# Altium PCB MCH_CLKB_PCB.PcbDoc (part 1 of 5)
Units mil, origin at the board's own origin, x right, y up, seen from the top; angles counter-clockwise.
Board outline 7110.67 x 2894.12 mil, 6 copper layers (Top Layer, GND, MidLayer1, MidLayer2, InternalPlane1, Bottom Layer), stack 61.549 mil thick; 421 components, 433 nets, 2112 pads, 1311 vias.
Unrouted connection lines stored in the file: 39.
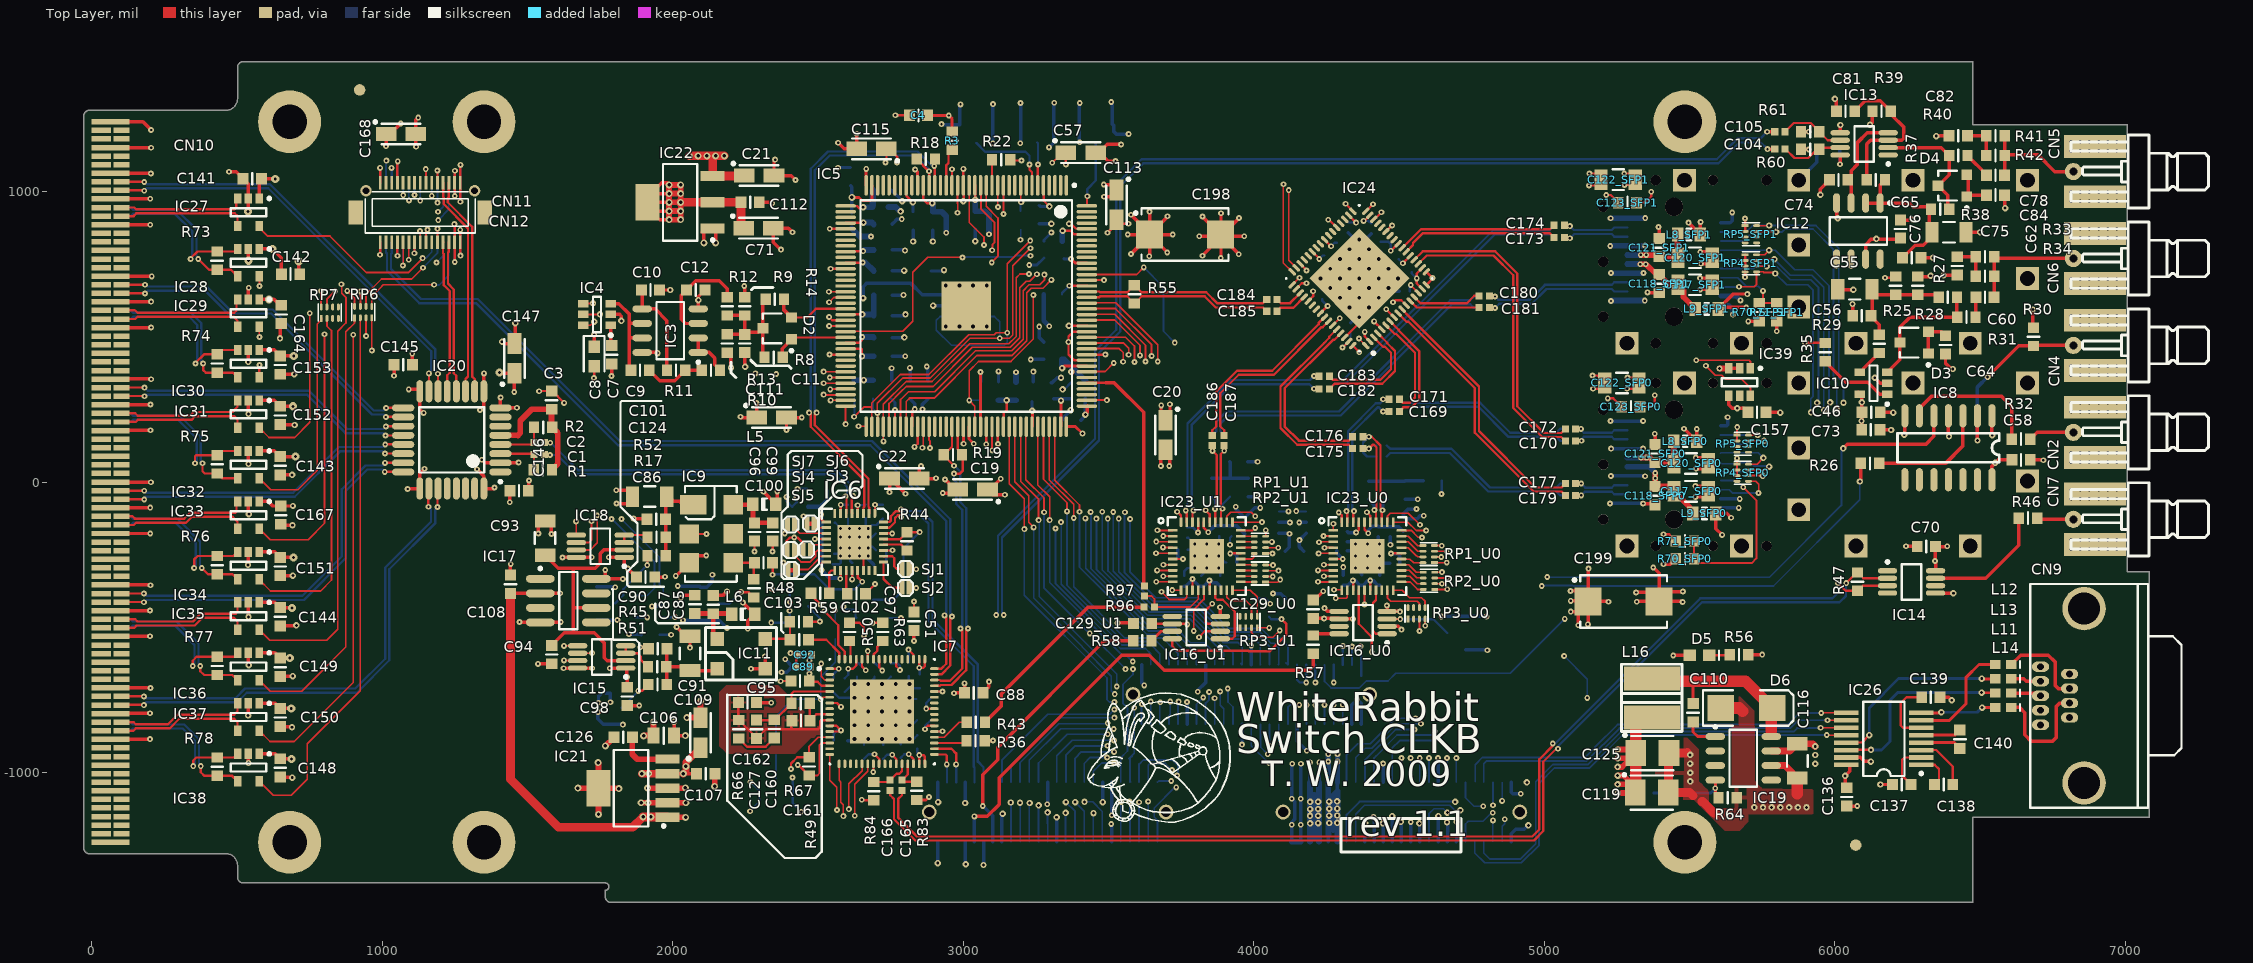
[diagram p0: Top Layer view]
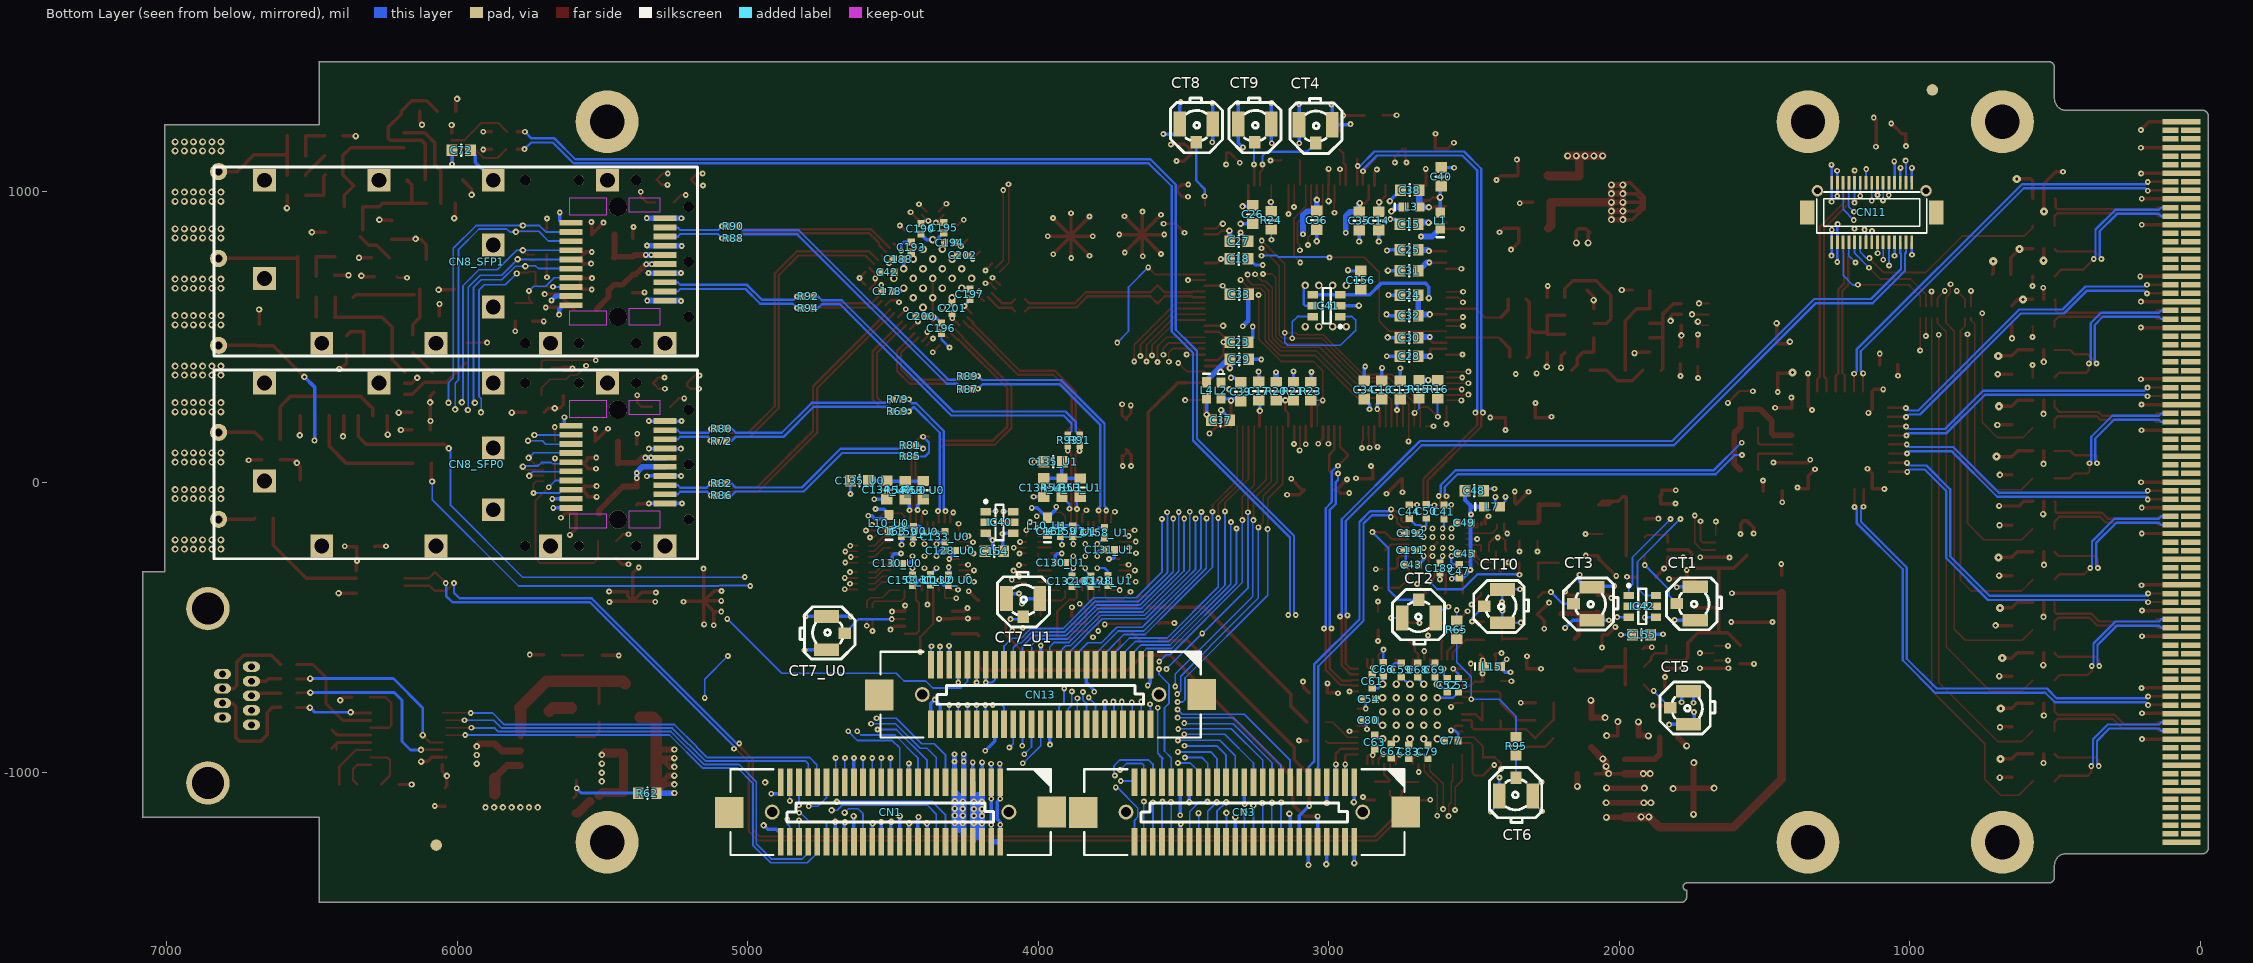
[diagram p1: Bottom Layer view, seen from below]
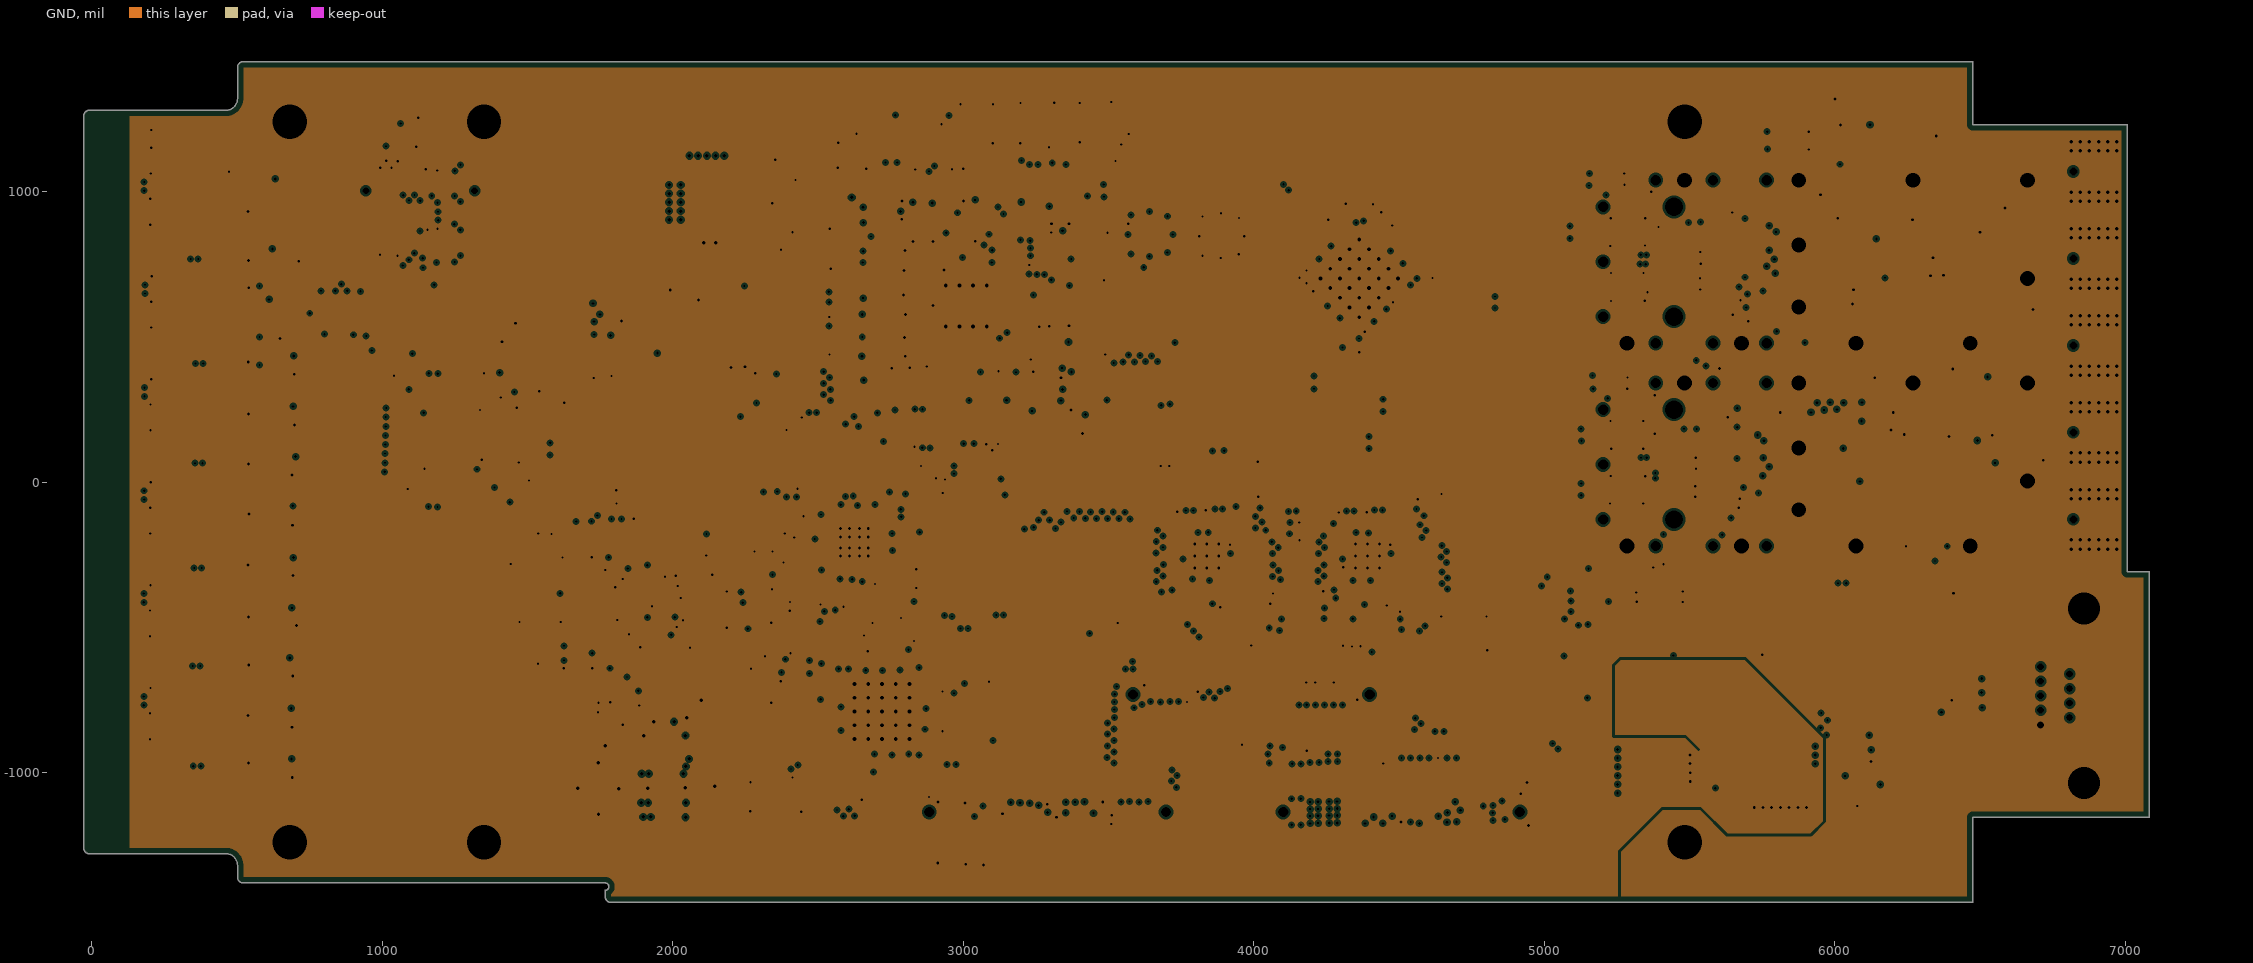
[diagram p2: GND, clearances drawn from the general rule]
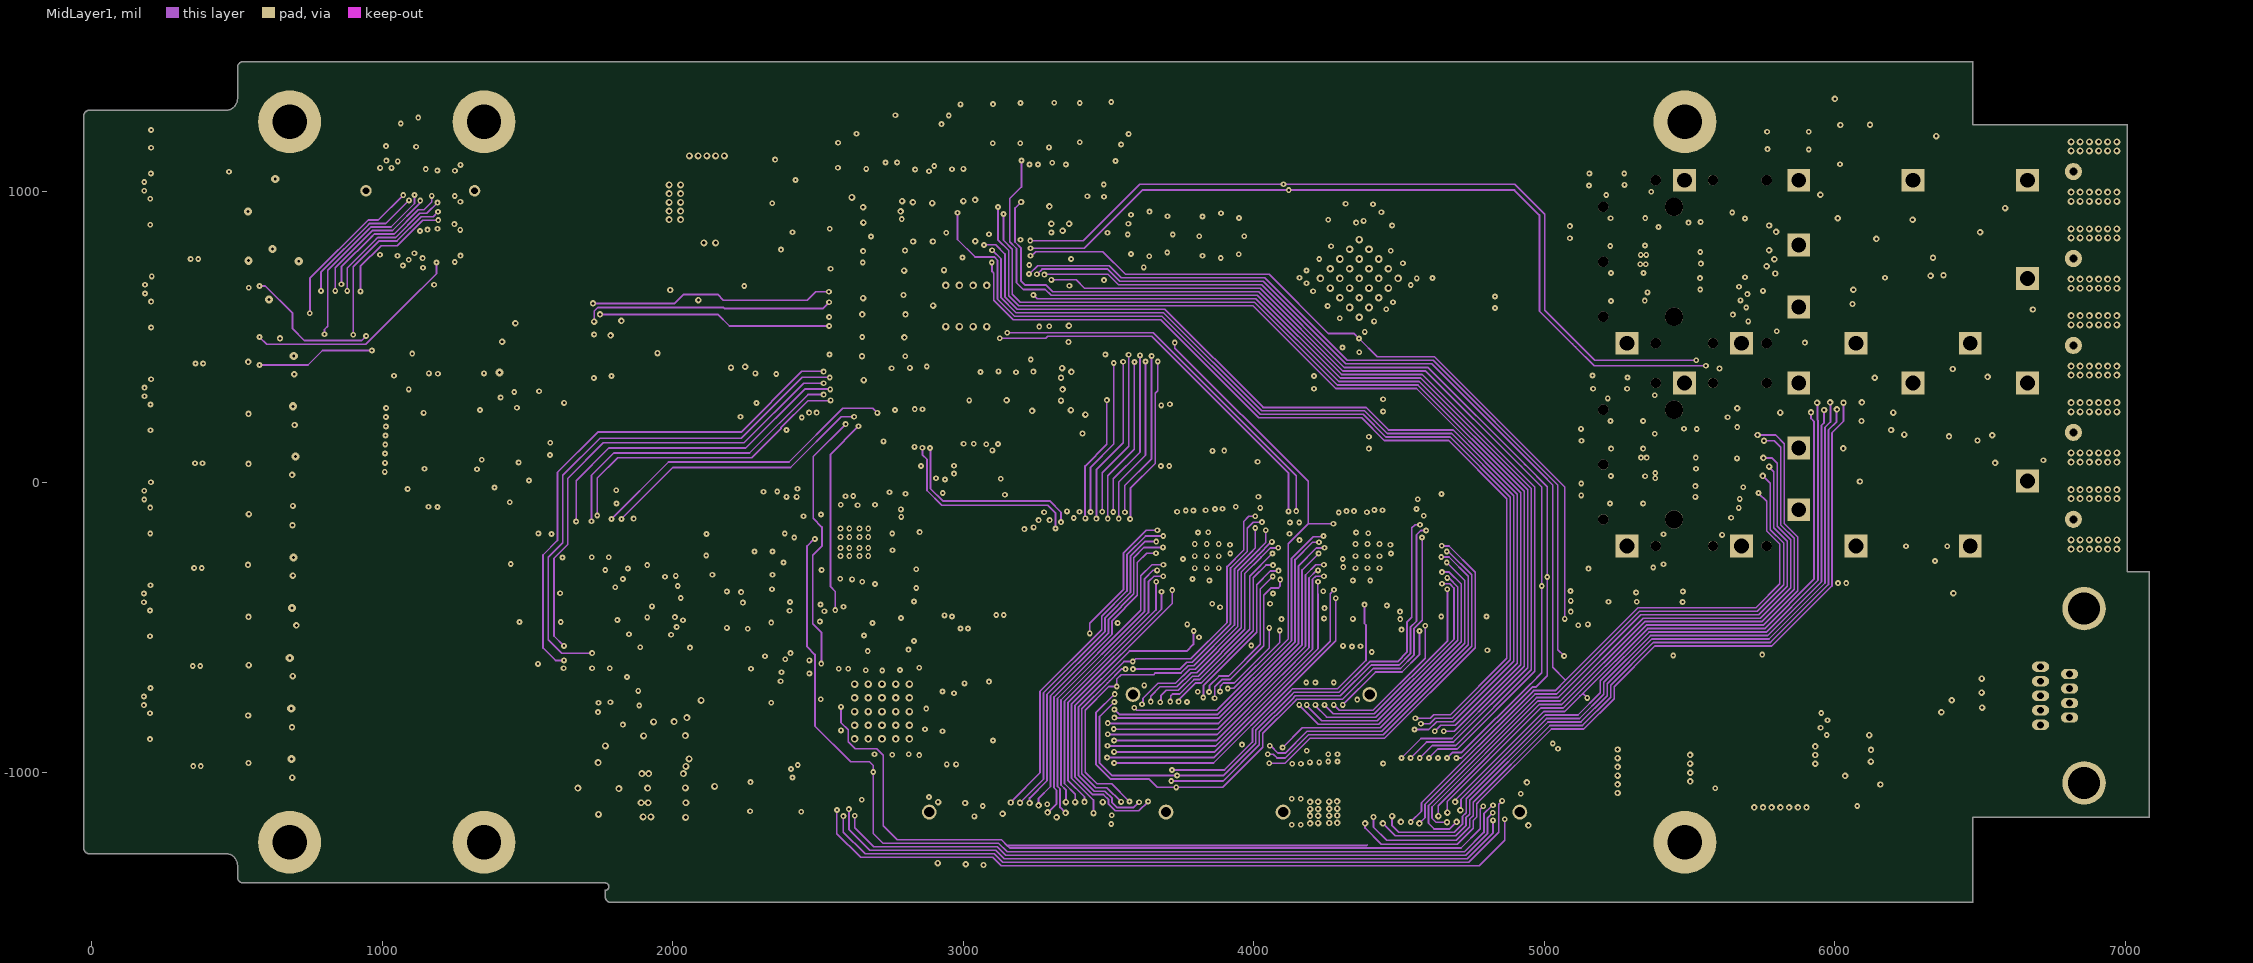
[diagram p3: MidLayer1]
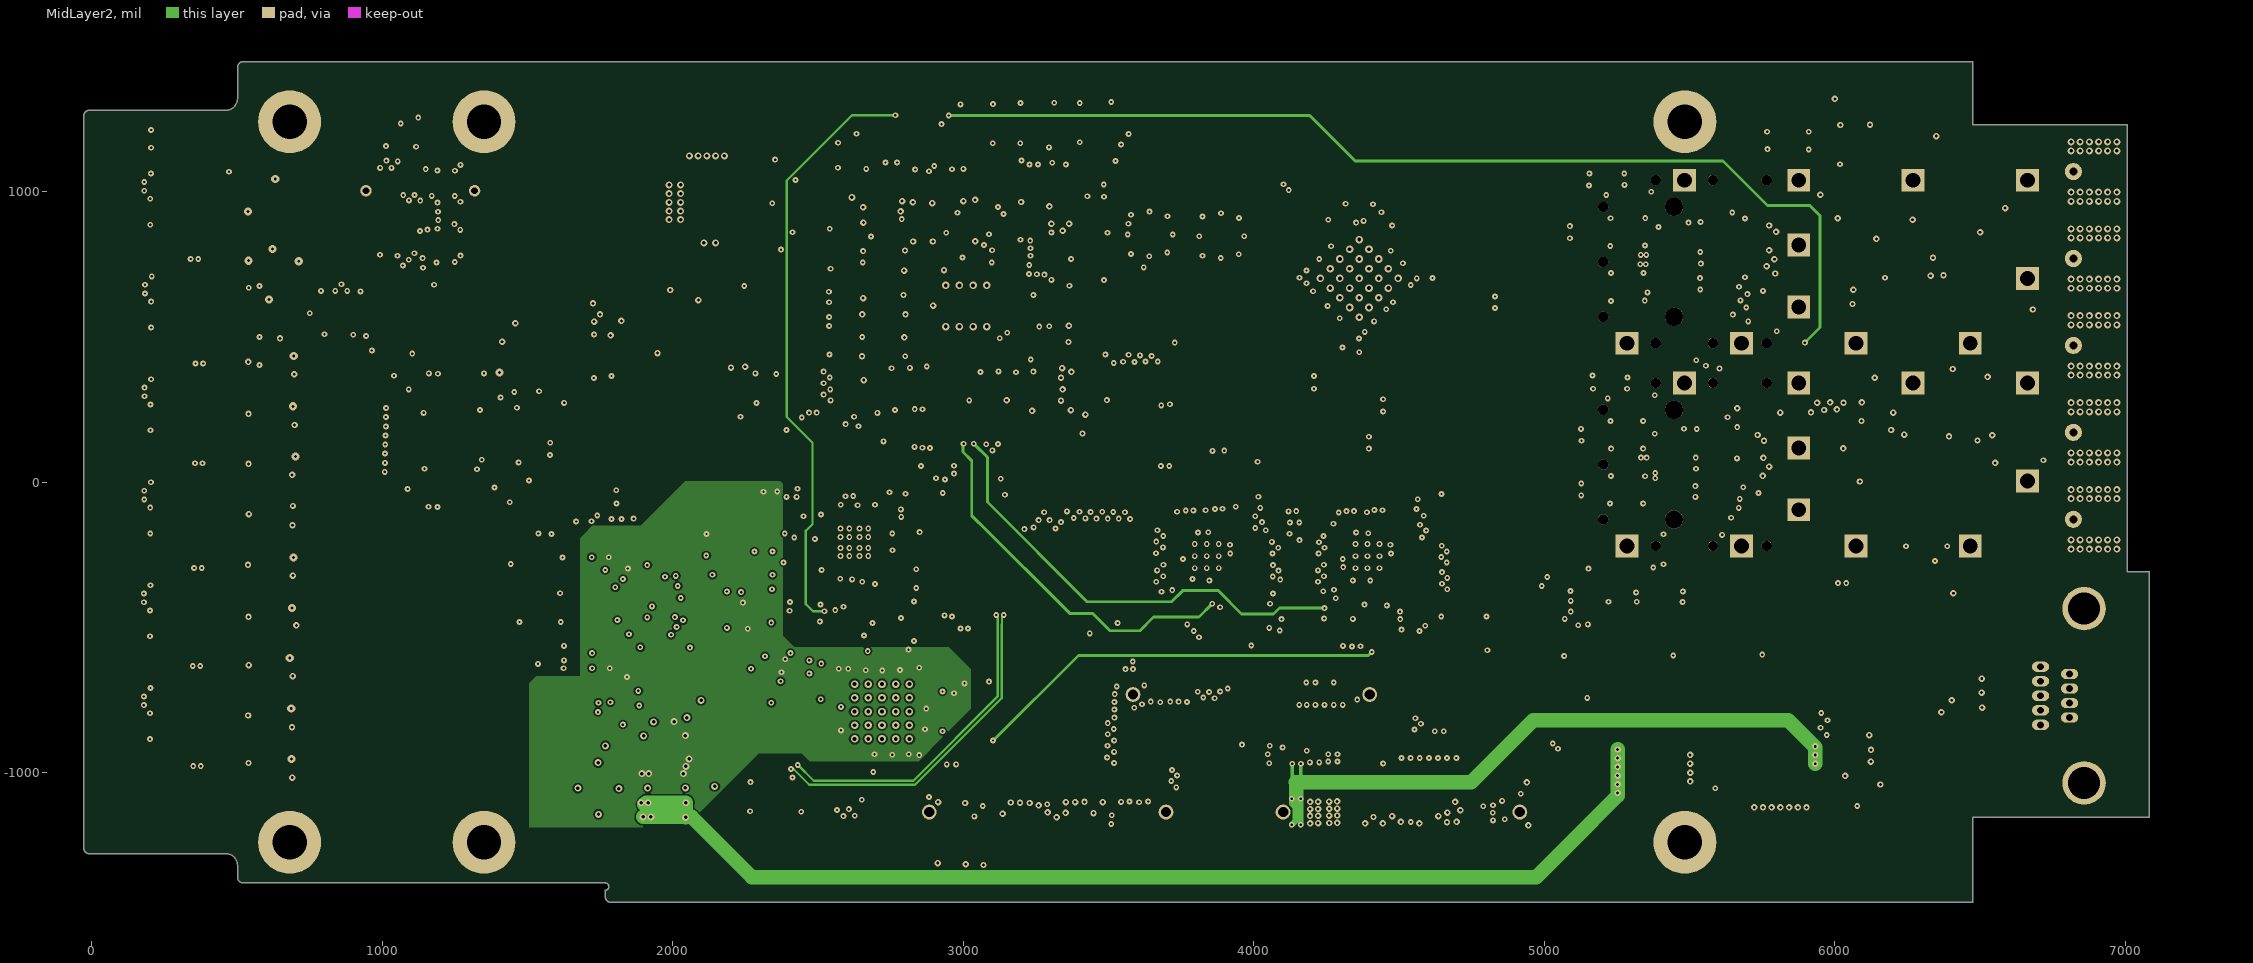
[diagram p4: MidLayer2]
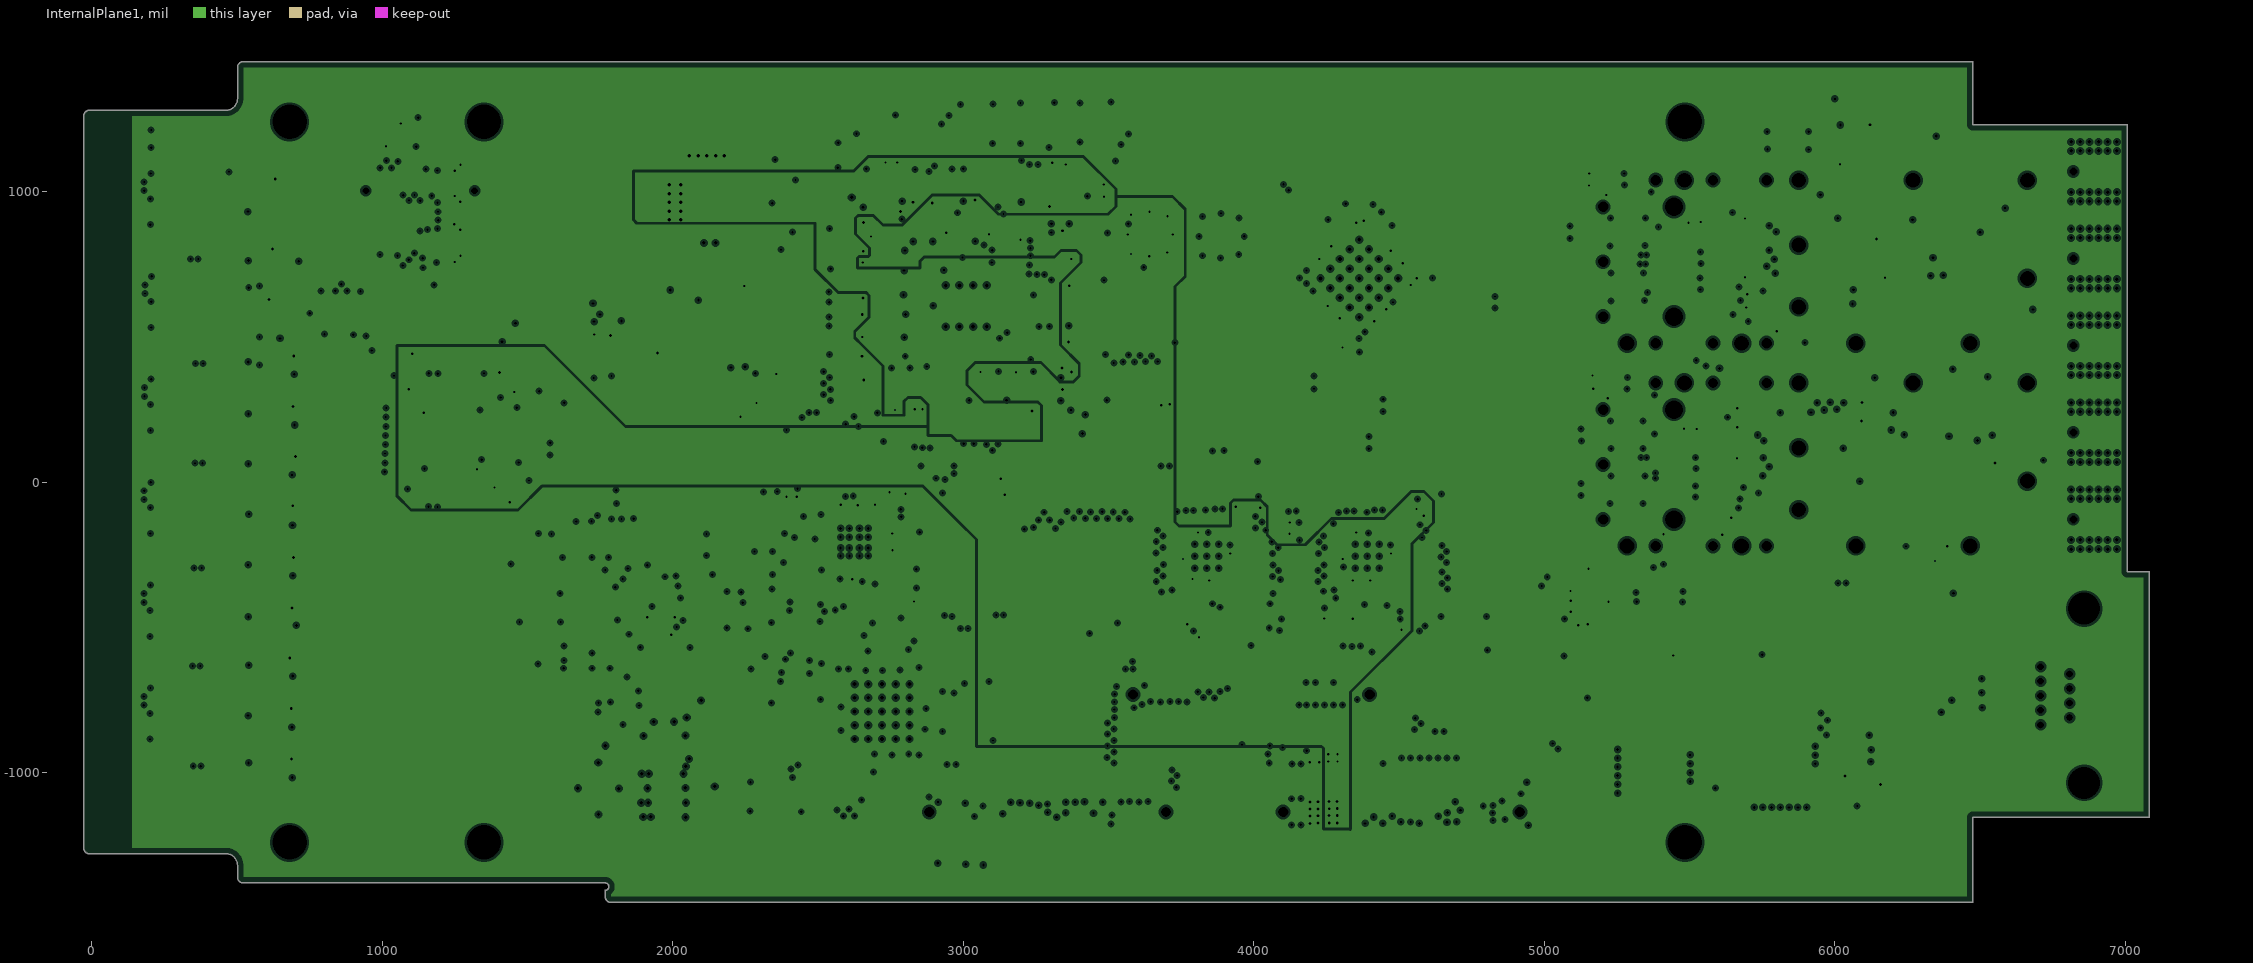
[diagram p5: InternalPlane1, clearances drawn from the general rule]

## Layer stack, top to bottom
Top Layer: signal copper 1.4
Dielectric: core 10.6299, FR-4, Dk 4.8
GND: plane copper 1.4, net GND
Dielectric: prepreg 10.6299, FR-4, Dk 4.8
MidLayer1: signal copper 1.4
Dielectric: core 10.6299, FR-4, Dk 4.8
MidLayer2: signal copper 1.4
Dielectric: prepreg 10.6299, FR-4, Dk 4.8
InternalPlane1: plane copper 1.4, net (Multiple Nets)
Dielectric: core 10.6299, FR-4, Dk 4.8
Bottom Layer: signal copper 1.4

## Board outline
-8.43,-1279.74 ccw(c-8.41,-1279.53) -8.41,-1279.74 -8.39,-1279.74 ccw(c-7.73,-1259.78) -7.76,-1279.75 ccw(c-7.76,-1279.54) -7.69,-1279.74 462.66,-1279.74 cw(c462.66,-1318.9) 501.82,-1318.9 501.82,-1360.24 ccw(c521.71,-1360.24) 521.71,-1380.13 1767.78,-1380.13 cw(c1767.78,-1392.72) 1780.36,-1392.72 cw(c1767.78,-1392.72) 1767.78,-1405.3 ccw(c1767.78,-1405.51) 1767.56,-1405.51 1767.56,-1427.17 ccw(c1787.46,-1427.17) 1787.46,-1447.06 6474.47,-1447.06 ccw(c6474.47,-1446.85) 6474.68,-1446.85 6474.68,-1153.76 7082.74,-1153.76 ccw(c7082.74,-1153.54) 7082.95,-1153.54 7082.95,-309.51 ccw(c7082.74,-309.51) 7082.63,-309.33 ccw(c7082.54,-309.52) 7082.54,-309.31 7007.57,-309.31 7007.57,1230.2 ccw(c7007.36,1230.2) 7007.56,1230.28 ccw(c7007.35,1230.31) 7007.56,1230.31 ccw(c7007.35,1230.31) 7007.35,1230.53 6474.68,1230.53 6474.68,1446.85 ccw(c6474.47,1446.85) 6474.47,1447.06 521.71,1447.06 ccw(c521.71,1427.17) 501.82,1427.17 501.82,1318.9 cw(c461.67,1319.88) 462.09,1279.73 ccw(c462.03,1279.53) 462.03,1279.74 -7.8,1279.74 ccw(c-7.8,1279.53) -7.86,1279.73 ccw(c-7.74,1259.76) -27.72,1259.79 ccw(c-27.51,1259.79) -27.71,1259.73 -27.71,-1259.92 ccw(c-27.5,-1259.92) -27.7,-1259.99 ccw(c-7.73,-1259.78)

## Design rules (kind name [scope] priority, off if disabled: settings)
Clearance Clearance_ext_gnd [inpolygon and onlayer('top layer') and innet('gnd') vs not innet('gnd')] p1: gap=16
Clearance Clearance_poly [InPolygon and (InNet('+2v5') or innet('+3v3') or innet('+1v2'))] p2: gap=8
Clearance [All] p3: gap=6
DiffPairsRouting [All] p1: maxlimit=10 minlimit=6 mostfreqgap=10 toplayer_prefgap=6 midlayer1_prefgap=6 midlayer2_prefgap=6 bottomlayer_prefgap=6 maxuncoupledlength=500
HoleSize [All] p1: absolutevalues=TRUE maxlimit=118.11 minlimit=1 maxpercent=80.000 minpercent=20.000
PlaneClearance [All] p1: clearance=8
PlaneConnect [All] p1: planeconnectstyle=Direct reliefexpansion=20 reliefentries=4 reliefconductorwidth=10 reliefairgap=10
PolygonConnect PolygonConnect_ext_vias [name='poly_external' vs isvia] p1: connectstyle=Direct reliefconductorwidth=10 reliefentries=4 polygonreliefangle="90 Angle"
PolygonConnect PolygonConnect_external [name='poly_external' vs not isvia] p2: connectstyle=Relief reliefconductorwidth=15 reliefentries=4 polygonreliefangle="90 Angle"
PolygonConnect PolygonConnect_internal [name='poly_internal'] p3: connectstyle=Direct reliefconductorwidth=10 reliefentries=4 polygonreliefangle="90 Angle"
PolygonConnect [name='poly_ext_gnd'] p4: connectstyle=Direct reliefconductorwidth=10 reliefentries=4 polygonreliefangle="90 Angle"
RoomDefinition U_CLKB_uplinks [InComponentClass('U_CLKB_uplinks')] p1: confinementstyle=ConfineIn formatcopy=TRUE lockcomponents=FALSE outline 3601.5,1002 5150.5,1002 5150.5,-642 3601.5,-642
RoomDefinition U1 [InComponentClass('U1')] p2: confinementstyle=ConfineIn formatcopy=TRUE lockcomponents=FALSE outline -1527.5,-3020 472.5,-3020 472.5,-2020 -1527.5,-2020
RoomDefinition U0 [InComponentClass('U0')] p3: confinementstyle=ConfineIn formatcopy=TRUE lockcomponents=FALSE outline -1527.5,-3020 472.5,-3020 472.5,-2020 -1527.5,-2020
RoomDefinition SMI [InComponentClass('SMI')] p4: confinementstyle=ConfineIn formatcopy=TRUE lockcomponents=FALSE outline -1527.5,-3020 472.5,-3020 472.5,-2020 -1527.5,-2020
RoomDefinition SFP1 [InComponentClass('SFP1')] p5: confinementstyle=ConfineIn formatcopy=TRUE lockcomponents=FALSE outline -1527.5,-3020 472.5,-3020 472.5,-2020 -1527.5,-2020
RoomDefinition SFP0 [InComponentClass('SFP0')] p6: confinementstyle=ConfineIn formatcopy=TRUE lockcomponents=FALSE outline -1527.5,-3020 472.5,-3020 472.5,-2020 -1527.5,-2020
RoutingVias [All] p1: holewidth=8 width=20 viastyle="Through Hole" minholewidth=8 minwidth=20 maxholewidth=50 maxwidth=100
SilkscreenOverComponentPads [All] p1: minsilkscreentomaskgap=10
SolderMaskExpansion [All] p1: expansion=4
TestPointUsage [All] p1: valid=0 allowmultiple=FALSE
Testpoint [All] p1: side=15 testpointundercomponent=TRUE minsize=40 maxsize=100 preferedsize=60 minholesize=0 maxholesize=40 preferedholesize=32 testpointgrid=1 style=1023 order=0-112345678
Width [All] p1: maxlimit=200 minlimit=5 preferedwidth=5
19 further rules are at their usual default settings.

## Classes and differential pairs
channel class CLKB_uplink_phy: U0 U1
component class U1: C128_U1 C129_U1 C130_U1 C131_U1 C132_U1 C133_U1 C134_U1 C135_U1 C158_U1 C159_U1 C163_U1 CT7_U1 IC16_U1 IC23_U1 L10_U1 R53_U1 R54_U1 RP1_U1 RP2_U1 RP3_U1
component class U0: C128_U0 C129_U0 C130_U0 C131_U0 C132_U0 C133_U0 C134_U0 C135_U0 C158_U0 C159_U0 C163_U0 CT7_U0 IC16_U0 IC23_U0 L10_U0 R53_U0 R54_U0 RP1_U0 RP2_U0 RP3_U0
channel class CLKB_SFP_wrapper: SFP0 SFP1
component class U_CLKB_uplinks: C169 C170 C171 C172 C173 C174 C175 C176 C177 C178 C179 C180 C181 C182 C183 C184 C185 C186 C187 C188 C189 C190 C191 C192 C193 C194 C195 C196 C197 C200 C201 C202 IC24 IC? R69 R72 R79 R80 R81 R82 R85 R86 R87 R88 R89 R90 R91 R92 R93 R94
component class SFP1: C117_SFP1 C118_SFP1 C120_SFP1 C121_SFP1 C122_SFP1 C123_SFP1 CN8_SFP1 L8_SFP1 L9_SFP1 R70_SFP1 R71_SFP1 RP4_SFP1 RP5_SFP1
component class SFP0: C117_SFP0 C118_SFP0 C120_SFP0 C121_SFP0 C122_SFP0 C123_SFP0 CN8_SFP0 L8_SFP0 L9_SFP0 R70_SFP0 R71_SFP0 RP4_SFP0 RP5_SFP0
component class APD: C7 C8 C9 C10 C11 C12 D2 IC3 IC4 R8 R9 R10 R11 R12 R13 R14
component class CLKB_main: CN1 CN2 CN3 CN4 CN5 CN6 CN7 CN13 R57 R58 R96 R97
component class CLK: C4 C41 C42 C43 C44 C45 C46 C47 C48 C49 C50 C51 C52 C53 C54 C55 C56 C58 C59 C60 C61 C62 C63 C64 C65 C66 C67 C68 C69 C70 C72 C73 C74 C75 C76 C77 C78 C79 C80 C81 C82 C83 C84 C85 C86 C87 C88 C89 C90 C91 C92 C93 C94 C95 C96 C97 C98 C99 C100 C101 C102 C103 C104 C105 C124 C127 C160 C161 C162 C165 C166 CT1 CT2 CT3 CT5 CT6 CT10 D3 D4 IC6 IC7 IC8 IC9 IC10 IC11 IC12 IC13 IC14 IC15 IC17 IC18 L5 L6 L7 L15 R17 R25 R26 R27 R28 R29 R30 R31 R32 R33 R34 R35 R36 R37 R38 R39 R40 R41 R42 R43 R44 R45 R46 R47 R48 R49 R50 R51 R52 R59 R60 R61 R63 R65 R66 R67 R83 R84 R95 SJ1 SJ2 SJ3 SJ4 SJ5 SJ6 SJ7
component class FPGA: C13 C14 C15 C16 C17 C18 C19 C20 C21 C22 C23 C24 C25 C26 C27 C28 C29 C30 C31 C32 C33 C34 C35 C36 C37 C38 C39 C40 C57 C71 CT4 CT8 CT9 IC5 L1 L2 L3 L4 R3 R15 R16 R18 R19 R20 R21 R22 R23 R24 R55
component class PWR: C106 C107 C108 C109 C110 C111 C112 C113 C115 C116 C119 C125 C126 C198 C199 D5 D6 IC19 IC21 IC22 L16 R56 R62 R64
component class RS232: C136 C137 C138 C139 C140 CN9 IC26 L11 L12 L13 L14
component class SENS: C154 C155 C156 C157 IC39 IC40 IC41 IC42
component class SMI: C1 C2 C3 C141 C142 C143 C144 C145 C146 C147 C148 C149 C150 C151 C152 C153 C164 C167 C168 CN10 CN11 CN12 IC20 IC27 IC28 IC29 IC30 IC31 IC32 IC33 IC34 IC35 IC36 IC37 IC38 R1 R2 R73 R74 R75 R76 R77 R78 RP6 RP7
net class CMI_PIO[0..3]: CMI_PIO0 CMI_PIO1 CMI_PIO2 CMI_PIO3
net class UP0_RD[0..9]: UP0_RD0 UP0_RD1 UP0_RD2 UP0_RD3 UP0_RD4 UP0_RD5 UP0_RD6 UP0_RD7 UP0_RD8 UP0_RD9
net class UP0_TD[0..9]: UP0_TD0 UP0_TD1 UP0_TD2 UP0_TD3 UP0_TD4 UP0_TD5 UP0_TD6 UP0_TD7 UP0_TD8 UP0_TD9
net class UP1_RD[0..9]: UP1_RD0 UP1_RD1 UP1_RD2 UP1_RD3 UP1_RD4 UP1_RD5 UP1_RD6 UP1_RD7 UP1_RD8 UP1_RD9
net class UP1_TD[0..9]: UP1_TD0 UP1_TD1 UP1_TD2 UP1_TD3 UP1_TD4 UP1_TD5 UP1_TD6 UP1_TD7 UP1_TD8 UP1_TD9
differential pair EXTREF: +EXTREF_P -EXTREF_N
differential pair REFCLK_MAIN: +REFCLK_MAIN_P -REFCLK_MAIN_N
differential pair REFCLK_FB: +REFCLK_FB_P -REFCLK_FB_N
differential pair REFCLK_FAN: +REFCLK_FAN_P -REFCLK_FAN_N
differential pair UP1_TX: +UP1_TX_P -UP1_TX_N
differential pair UP1_RX: +UP1_RX_P -UP1_RX_N
differential pair UP0_TX: +UP0_TX_P -UP0_TX_N
differential pair UP0_RX: +UP0_RX_P -UP0_RX_N
differential pair SMI_RX0: +SMI_RX0_P -SMI_RX0_N
differential pair SMI_RX1: +SMI_RX1_P -SMI_RX1_N
differential pair SMI_RX2: +SMI_RX2_P -SMI_RX2_N
differential pair SMI_RX3: +SMI_RX3_P -SMI_RX3_N
differential pair SMI_RX4: +SMI_RX4_P -SMI_RX4_N
differential pair SMI_RX5: +SMI_RX5_P -SMI_RX5_N
differential pair SMI_TX0: +SMI_TX0_P -SMI_TX0_N
differential pair SMI_TX1: +SMI_TX1_P -SMI_TX1_N
differential pair SMI_TX2: +SMI_TX2_P -SMI_TX2_N
differential pair SMI_TX3: +SMI_TX3_P -SMI_TX3_N
differential pair SMI_TX4: +SMI_TX4_P -SMI_TX4_N
differential pair SMI_TX5: +SMI_TX5_P -SMI_TX5_N
differential pair SFP0_RX: +SFP0_RX_P -SFP0_RX_N
differential pair SFP0_TX: +SFP0_TX_P -SFP0_TX_N
differential pair SFP1_RX: +SFP1_RX_P -SFP1_RX_N
differential pair SFP1_TX: +SFP1_TX_P -SFP1_TX_N
differential pair XIN0: +XIN0_P -XIN0_N
differential pair XIN1: +XIN1_P -XIN1_N
differential pair XIN2: +XIN2_P -XIN2_N
differential pair XIN3: +XIN3_P -XIN3_N
differential pair XIN4: +XIN4_P -XIN4_N
differential pair XIN5: +XIN5_P -XIN5_N
differential pair XIN6: +XIN6_P -XIN6_N
differential pair XIN7: +XIN7_P -XIN7_N
differential pair XOUT0: +XOUT0_P -XOUT0_N
differential pair XOUT1: +XOUT1_P -XOUT1_N
differential pair XOUT2: +XOUT2_P -XOUT2_N
differential pair XOUT3: +XOUT3_P -XOUT3_N
differential pair XOUT4: +XOUT4_P -XOUT4_N
differential pair XOUT5: +XOUT5_P -XOUT5_N
differential pair XOUT6: +XOUT6_P -XOUT6_N
differential pair XOUT7: +XOUT7_P -XOUT7_N
differential pair XP_FB: +XP_FB_P -XP_FB_N
differential pair PW0: +PW0_P -PW0_N
differential pair PW1: +PW1_P -PW1_N
differential pair PW2: +PW2_P -PW2_N
differential pair PW3: +PW3_P -PW3_N
differential pair DMTDCLK_SLOT1: +DMTDCLK_SLOT1_P -DMTDCLK_SLOT1_N
differential pair DMTDCLK_SLOT2: +DMTDCLK_SLOT2_P -DMTDCLK_SLOT2_N
differential pair DMTDCLK_SLOT3: +DMTDCLK_SLOT3_P -DMTDCLK_SLOT3_N
differential pair DMTDCLK_SLOT4: +DMTDCLK_SLOT4_P -DMTDCLK_SLOT4_N
differential pair DMTDCLK_SLOT5: +DMTDCLK_SLOT5_P -DMTDCLK_SLOT5_N
differential pair DMTDCLK_SLOT6: +DMTDCLK_SLOT6_P -DMTDCLK_SLOT6_N
differential pair DMTDCLK_SLOT7: +DMTDCLK_SLOT7_P -DMTDCLK_SLOT7_N
differential pair DMTDCLK_SLOT8: +DMTDCLK_SLOT8_P -DMTDCLK_SLOT8_N
differential pair DMTDCLK_FAN: +DMTDCLK_FAN_P -DMTDCLK_FAN_N
differential pair DMTDCLK_FB: +DMTDCLK_FB_P -DMTDCLK_FB_N
differential pair DMTDCLK_MAIN: +DMTDCLK_MAIN_P -DMTDCLK_MAIN_N
differential pair EXT125: +EXT125_P -EXT125_N

## Components (designator, comment, footprint, x,y, rotation, side; value= is the part's Value field where it differs from the comment)
C1 "22n" CAPC1005X55N#1 1540.4,94.7 r180 top
C2 "22n" CAPC1005X55N#1 1540.4,135.7 r180 top
C3 "100n" CAPC1608X87N 1583,282 r270 top
C4 "100n" CAPC1608X87N 2846,1262 r0 top
C7 "*" CAPC1608X87N 1789.5,438 r270 top
C8 "*" CC1608-0603 1729.5,432 r270 top
C9 "*" CAPC1608X87N 1887.5,385 r0 top
C10 "*" CAPC1608X87N 1923.5,661 r180 top
C11 "*" CAPC1608X87N 2247.5,477 r90 top
C12 "*" CAPC1608X87N 2079.5,661 r180 top
C13 "100n" CAPC1608X87N 2753.5,317 r90 bottom
C14 "10n" CAPC1608X87N 2827.5,899 r90 bottom
C15 "100n" CAPC1608X87N 2723.5,887 r0 bottom
C16 "100n" CAPC1608X87N 2817.5,317 r270 bottom
C17 "100n" CAPC1608X87N 3241.5,313 r90 bottom
C18 "10n" CAPC1608X87N 3309.5,768 r0 bottom
C19 "22u/10V" CAPMP3216X180N 3032.5,-26 r180 top
C20 "22u/10V" CAPMP3216X180N 3696.5,162 r270 top
C21 "22u/10V" CAPMP3216X180N 2297.5,1055 r0 top
C22 "22u/10V" CAPMP3216X180N 2797.5,12 r0 top
C23 "100n" CAPC1608X87N 3309.5,481 r180 bottom
C24 "100n" CAPC1608X87N 2723.5,643 r180 bottom
C25 "100n" CAPC1608X87N 2723.5,799 r0 bottom
C26 "10n" CAPC1608X87N 3261.5,921 r90 bottom
C27 "100n" CAPC1608X87N 3309.5,829 r180 bottom
C28 "100n" CAPC1608X87N 2723.5,433 r180 bottom
C29 "100n" CAPC1608X87N 3308.5,422 r180 bottom
C30 "10n" CAPC1608X87N 2723.5,497 r180 bottom
C31 "100n" CAPC1608X87N 2723.5,727 r0 bottom
C32 "100n" CAPC1608X87N 2723.5,573 r180 bottom
C33 "100n" CAPC1608X87N 3308.5,646 r180 bottom
C34 "100n" CAPC1608X87N 2877.5,317 r270 bottom
C35 "100n" CAPC1608X87N 2895.5,899 r270 bottom
C36 "100n" CAPC1608X87N 3041.5,901 r270 bottom
C37 "10n" CAPC1608X87N 3372.5,212 r0 bottom
C38 "10n" CAPC1608X87N 2721.5,1005 r180 bottom
C39 "10n" CAPC1608X87N 3303.5,311 r270 bottom
C40 "10n" CAPC1608X87N 2612.5,1051 r270 bottom
C41 "100n" CAPC1005X55N#2 2603.5,-103 r270 bottom
C42 "100n" CAPC1005X55N#2 4520.5,722 r180 bottom
C43 "100n" CAPC1005X55N#2 2715.5,-284 r180 bottom
C44 "100n" CAPC1005X55N#2 2723.5,-102 r270 bottom
C45 "100n" CAPC1005X55N#2 2531.5,-247 r0 bottom
C46 "10n" CAPC1608X87N 6125.5,240 r0 top
C47 "100n" CAPC1005X55N#2 2550.5,-307 r90 bottom
C48 "10u X7R" CAPC1608X87N 2499.5,-30 r180 bottom
C49 "100n" CAPC1005X55N#2 2534.5,-140 r0 bottom
C50 "100n" CAPC1005X55N#2 2664.5,-101 r270 bottom
C51 "10u X7R" CAPC1608X87N 2830.5,-479 r270 top
C52 "100n" CAPC1005X55N#2 2592.5,-699 r270 bottom
C53 "100n" CAPC1005X55N#2 2553.5,-700 r270 bottom
C54 "100n" CAPC1005X55N#2 2862.5,-747 r180 bottom
C55 "10u/6.3V X7R" CAPC3216X140N 6069.5,664 r0 top
C56 "100n" CAPC1608X87N 6093.5,572 r0 top
C57 "22u/10V" CAPMP3216X180N 3404.5,1134 r0 top
C58 "100n" CAPC1608X87N 6641.5,76 r180 top
C59 "100n" CAPC1005X55N#2 2750.5,-647 r270 bottom
C60 "47n" CAPC1608X87N 6517.5,636 r180 top
C61 "100n" CAPC1005X55N#2 2850.5,-686 r270 bottom
C62 "47n" CAPC1608X87N 6421.5,744 r270 top
C63 "100n" CAPC1005X55N#2 2841.5,-895 r90 bottom
C64 "100n" CAPC1608X87N 6381.5,472 r90 top
C65 "100n" CAPC1608X87N 6226.5,871 r270 top
C66 "100n" CAPC1005X55N#2 2812.5,-644 r270 bottom
C67 "100n" CAPC1005X55N#2 2784.5,-926 r90 bottom
C68 "100n" CAPC1005X55N#2 2694.5,-647 r270 bottom
C69 "100n" CAPC1005X55N#2 2634.5,-647 r270 bottom
C70 "100n" CAPC1608X87N 6315.5,-222 r180 top
C71 "22u/10V" CAPMP3216X180N 2295.5,874 r0 top
C72 "100n" CAPC1608X87N 5986.5,1142 r0 bottom
C73 "100n" CAPC1608X87N 6124.5,180 r180 top
C74 "100n" CAPC1608X87N 6013.5,1040 r180 top
C75 "10u/10V" CAPC3216X140N 6393.5,860 r180 top
C76 "100n" CAPC1608X87N 6265.5,772 r0 top
C77 "100n" CAPC1005X55N#2 2578.5,-890 r0 bottom
C78 "47n" CAPC1608X87N 6553.5,1056 r180 top
C79 "100n" CAPC1005X55N#2 2658.5,-929 r90 bottom
C80 "100n" CAPC1005X55N#2 2864.5,-820 r180 bottom
C81 "100n" CAPC1608X87N 6037.5,1276 r180 top
C82 "47n" CAPC1608X87N 6425.5,1192 r180 top
C83 "100n" CAPC1005X55N#2 2724.5,-929 r90 bottom
C84 "100n" CAPC1608X87N 6553.5,988 r0 top
C85 "10n" CAPC1608X87N 2139.5,-422 r270 top
C86 "100n" CAPC1608X87N 1906.5,-327 r0 top
C87 "100n" CAPC1608X87N 2076.5,-421 r270 top
C88 "10u X7R" CAPC1608X87N 3036.5,-726 r0 top
C89 "1n" CAPC1005X55N#2 2448.5,-636 r0 top
C90 "100n" CAPC1608X87N 1948.5,-574 r0 top
C91 "10u/10V*" CAPC3216X140N 2059.5,-590 r270 top
C92 "100n" CAPC1005X55N#2 2454.5,-595 r0 top
C93 "10u/10V" CAPC3216X140N 1560.5,-193 r270 top
C94 "10n" CAPC1608X87N 1583.5,-594 r90 top
C95 "10u X7R" CAPC1608X87N 2438.5,-685 r0 top
C96 "10n" CAPC1608X87N 2281.5,-172 r90 top
C97 "10u/6.3V X7R" CAPC1608X87N 2632.5,-384 r0 top
C98 "100n" CAPC1608X87N 1843.5,-738 r270 top
C99 "100n" CAPC1608X87N 2344.5,-172 r90 top
C100 "100n" CAPC1608X87N 2312.5,-278 r0 top
C101 "10u/10V*" CAPC3216X140N 1920.5,-50 r0 top
C102 "10u/6.3V X7R" CAPC1608X87N 2507.5,-383 r180 top
C103 "100n" CAPC1608X87N 2435.5,-543 r180 top
C104 "100n" CAPC1005X55N#1 5811.5,1146 r180 top
C105 "100n" CAPC1005X55N#1 5811.5,1206 r180 top
C106 "2.2u" CAPC2012X135N 1969.5,-873 r0 top
C107 "10n" CAPC1608X87N 2113.5,-1004 r180 top
C108 "10n" CAPC1608X87N 1441.5,-352 r270 top
C109 "22u/10V" CAPMP3216X180N 2095.5,-863 r90 top
C110 "10n" CAPC1608X87N 5512.5,-794 r270 top
C111 "22u/10V" CAPMP3216X180N 2340.5,222 r0 top
C112 "10n" CAPC1608X87N 2266.5,963 r180 top
C113 "22u/10V" CAPMP3216X180N 3527.5,954 r270 top
C115 "22u/10V" CAPMP3216X180N 2684.5,1147 r180 top
C116 "10u X7R" CAPC3216X140N 5871.5,-960 r90 top
C117_SFP0 "10u/6.3V X7R" CAPC3216X140N 5505.5,-32 r0 top (schematic designator C117)
C117_SFP1 "10u/6.3V X7R" CAPC3216X140N 5519.5,679 r0 top (schematic designator C117)
C118_SFP0 "100n" CAPC1608X87N 5381.5,-47 r270 top (schematic designator C118)
C118_SFP1 "100n" CAPC1608X87N 5395.5,683 r270 top (schematic designator C118)
C119 "47u/6.3V Low ESR" CAPMP3528X210N 5370.5,-1069 r0 top
C120_SFP0 "10u/6.3V X7R" CAPC3216X140N 5505.5,64 r180 top (schematic designator C120)
C120_SFP1 "10u/6.3V X7R" CAPC3216X140N 5519.5,772 r180 top (schematic designator C120)
C121_SFP0 "100n" CAPC1608X87N 5381.5,98 r270 top (schematic designator C121)
C121_SFP1 "100n" CAPC1608X87N 5395.5,807 r270 top (schematic designator C121)
C122_SFP0 "10u/6.3V X7R" CAPC3216X140N 5267.5,341 r180 top (schematic designator C122)
C122_SFP1 "10u/6.3V X7R" CAPC3216X140N 5254.5,1041 r180 top (schematic designator C122)
C123_SFP0 "100n" CAPC1608X87N 5298.5,259 r180 top (schematic designator C123)
C123_SFP1 "100n" CAPC1608X87N 5286.5,962 r180 top (schematic designator C123)
C124 "100n" CAPC1608X87N 1943.5,-128 r0 top
C125 "47u/6.3V Low ESR" CAPMP3528X210N 5372.5,-933 r0 top
C126 "10n" CAPC1608X87N 1829.5,-879 r0 top
C127 "68p" CAPC1608X87N 2288.5,-851 r90 top
C128_U0 "100n" CAPC1005X55N#1 4303.5,-236 r180 bottom (schematic designator C128)
C128_U1 "100n" CAPC1005X55N#1 3760.5,-339 r270 bottom (schematic designator C128)
C129_U0 "100n" CAPC1608X87N 4204.5,-438 r270 top (schematic designator C129)
C129_U1 "100n" CAPC1608X87N 3617.5,-487 r0 top (schematic designator C129)
C130_U0 "10n" CAPC1005X55N#1 4485.5,-280 r0 bottom (schematic designator C130)
C130_U1 "10n" CAPC1005X55N#1 3923.5,-277 r0 bottom (schematic designator C130)
C131_U0 "10n" CAPC1005X55N#1 4371.5,-337 r270 bottom (schematic designator C131)
C131_U1 "10n" CAPC1005X55N#1 3755.5,-233 r180 bottom (schematic designator C131)
C132_U0 "100n" CAPC1005X55N#1 4308.5,-338 r270 bottom (schematic designator C132)
C132_U1 "100n" CAPC1005X55N#1 3884.5,-341 r270 bottom (schematic designator C132)
C133_U0 "100n" CAPC1005X55N#1 4321.5,-188 r90 bottom (schematic designator C133)
C133_U1 "100n" CAPC1005X55N#1 3818.5,-341 r270 bottom (schematic designator C133)
C134_U0 "100n" CAPC1608X87N 4521.5,-27 r90 bottom (schematic designator C134)
C134_U1 "100n" CAPC1608X87N 3980.5,-19 r90 bottom (schematic designator C134)
C135_U0 "10n" CAPC1608X87N 4615.5,4 r180 bottom (schematic designator C135)
C135_U1 "10n" CAPC1608X87N 3948.5,70 r180 bottom (schematic designator C135)
C136 "100n" CAPC1608X87N 6041.5,-1084 r90 top
C137 "100n" CAPC1608X87N 6231.15,-1041.19 r180 top
C138 "100n" CAPC1608X87N 6375.15,-1041.19 r180 top
C139 "100n" CAPC1608X87N 6331.15,-741.19 r0 top
C140 "100n" CAPC1608X87N 6431.15,-885.19 r270 top
C141 "100n" CAPC1608X87N 552.5,1044 r180 top
C142 "100n" CAPC1608X87N 684.5,716 r0 top
C143 "100n" CAPC1608X87N 648.5,56 r270 top
C144 "100n" CAPC1608X87N 648.5,-464 r270 top
C145 "100n" CAPC1608X87N 1072.5,404 r180 top
C146 "100n" CAPC1608X87N 1471,-30 r0 top
C147 "22u/10V" CAPMP3216X180N 1455.15,425.61 r90 top
C148 "100n" CAPC1608X87N 648.5,-984 r270 top
C149 "100n" CAPC1608X87N 648.5,-637.33 r270 top
C150 "100n" CAPC1608X87N 648.5,-810.67 r270 top
C151 "100n" CAPC1608X87N 648.5,-290.67 r270 top
C152 "100n" CAPC1608X87N 648.5,229.33 r270 top
C153 "100n" CAPC1608X87N 648.5,402.67 r270 top
C154 "100n" CAPC1608X87N 4151.5,-238 r180 bottom
C155 "100n" CAPC1608X87N 1923.5,-526 r0 bottom
C156 "100n" CAPC1608X87N 2890.5,695 r270 bottom
C157 "100n" CAPC1608X87N 5732.5,240 r180 top
C158_U0 "100n" CAPC1005X55N#1 4433.5,-338 r270 bottom (schematic designator C158)
C158_U1 "100n" CAPC1005X55N#1 3771.5,-174 r90 bottom (schematic designator C158)
C159_U0 "10n" CAPC1005X55N#1 4429.5,-171 r90 bottom (schematic designator C159)
C159_U1 "10n" CAPC1005X55N#1 3881.5,-169 r90 bottom (schematic designator C159)
C160 "220n" CAPC1608X87N 2349.5,-850 r90 top
C161 "33p" CAPC1608X87N 2441.5,-821 r0 top
C162 "220n" CAPC1608X87N 2257.5,-759 r180 top
C163_U0 "100n" CAPC1005X55N#1 4470.5,-170 r90 bottom (schematic designator C163)
C163_U1 "100n" CAPC1005X55N#1 3923.5,-169 r90 bottom (schematic designator C163)
C164 "100n" CAPC1608X87N 652,577 r270 top
C165 "100n" CAPC1005X55N#1 2789.5,-1044 r270 top
C166 "100n" CAPC1005X55N#1 2748.5,-1044 r270 top
C167 "100n" CAPC1608X87N 650.5,-114 r270 top
C168 "22u/10V" CAPMP3216X180N 1064.7,1198.4 r0 top
C169 "10n*" CAPC1005X55N#1 4483.5,243 r0 top
C170 "10n*" CAPC1005X55N#1 5090.5,141 r0 top
C171 "10n*" CAPC1005X55N#1 4483.5,285 r0 top
C172 "10n*" CAPC1005X55N#1 5090.5,183 r0 top
C173 "10n*" CAPC1005X55N#1 5051.5,842 r0 top
C174 "10n*" CAPC1005X55N#1 5051.5,884 r0 top
C175 "10n*" CAPC1005X55N#1 4358.5,115 r180 top
C176 "10n*" CAPC1005X55N#1 4358.5,156 r180 top
C177 "10n*" CAPC1005X55N#1 5090.5,-5 r0 top
C178 "100n" CAPC1005X55N#1 4519.5,656 r0 bottom
C179 "10n*" CAPC1005X55N#1 5090.5,-46 r0 top
C180 "10n*" CAPC1005X55N#1 4793.5,641 r0 top
C181 "10n*" CAPC1005X55N#1 4793.5,601 r0 top
C182 "10n*" CAPC1005X55N#1 4242.59,320.15 r0 top
C183 "10n*" CAPC1005X55N#1 4242.59,364.13 r0 top
C184 "10n*" CAPC1005X55N#1 4062.5,629 r180 top
C185 "10n*" CAPC1005X55N#1 4062.5,588 r180 top
C186 "10n*" CAPC1005X55N#1 3857.27,143.09 r90 top
C187 "10n*" CAPC1005X55N#1 3898.46,143.09 r90 top
C188 "100n" CAPC1005X55N#1 4481.5,767 r180 bottom
C189 "100n" CAPC1005X55N#1 2617.5,-296 r90 bottom
C190 "100n" CAPC1005X55N#1 4404.5,872 r270 bottom
C191 "100n" CAPC1005X55N#1 2717.5,-235 r180 bottom
C192 "100n" CAPC1005X55N#1 2716.5,-177 r180 bottom
C193 "100n" CAPC1005X55N#1 4437.5,809 r270 bottom
C194 "100n" CAPC1005X55N#1 4304.5,824 r0 bottom
C195 "100n" CAPC1005X55N#1 4325.5,876 r270 bottom
C196 "100n" CAPC1005X55N#1 4333.5,530 r90 bottom
C197 "100n" CAPC1005X55N#1 4235.5,647 r90 bottom
C198 "220u/10V" CAPMP7343X430N 3763.5,852 r0 top
C199 "220u/10V" CAPMP7343X430N 5273.5,-411 r0 top
C200 "100n" CAPC1005X55N#1 4403.5,570 r0 bottom
C201 "100n" CAPC1005X55N#1 4296.5,598 r270 bottom
C202 "100n" CAPC1005X55N#1 4260.5,780 r180 bottom
CN1 "JAE KX14-50p" JAE_KX14_50P 4508.72,-1136.22 r0 bottom locked
CN2 "EXTPPSOUT*" MCH_SPECIAL_FP_CLOCKS 7081.5,218.25 r0 top
CN3 "JAE KX14-50p" JAE_KX14_50P 3290.61,-1136.22 r0 bottom locked
CN4 "EXTPPSIN*" MCH_SPECIAL_FP_CLOCKS 7081.5,517.5 r0 top
CN5 "EXTREFIN_125M*" MCH_SPECIAL_FP_CLOCKS 7081.5,1116 r0 top
CN6 "EXTREFIN_10M*" MCH_SPECIAL_FP_CLOCKS 7081.5,816.75 r0 top
CN7 "EXTREFOUT*" MCH_SPECIAL_FP_CLOCKS 7081.5,-81 r0 top
CN8_SFP0 "SFP Module socket" SFP_SINGLE_PORT 5482.5,341 r270 bottom locked (schematic designator CN8)
CN8_SFP1 "SFP Module socket" SFP_SINGLE_PORT 5482.5,1039 r270 bottom locked (schematic designator CN8)
CN9 "DB9_MOLEX_MICRO" DSUB_MINI_9 6808.72,-735.83 r270 top locked
CN10 "UTCA_MCH_TONGUE3" UTCA_MCH_TONGUE2_3_4 -27.5,0 r0 top locked
CN11 "DF17(2.0)-30DP" DF17-30-PLUG 1131,927.9 r180 top locked
CN12 "DF17(4.0)-30DS" DF17-30-SOCKET 1131,928 r180 top locked
CN13 "JAE KX14-50p" JAE_KX14_50P 3991.79,-731.5 r0 bottom locked
CT1 "Vc_dmtd" CON_UFL_HIROSE_RECEPTACLE 1738.5,-361 r270 bottom
CT2 "UFL Fdmtd_pll_out" CON_UFL_HIROSE_RECEPTACLE 2632.5,-468 r0 bottom
CT3 "Fdmtd_pre_out" CON_UFL_HIROSE_RECEPTACLE 2094.5,-361.86 r270 bottom
CT4 "Fpga_out1" CON_UFL_HIROSE_RECEPTACLE 3102.5,1230 r180 bottom
CT5 "Vc_tcxo" CON_UFL_HIROSE_RECEPTACLE 1761.5,-719.86 r270 bottom
CT6 "Pll_status" CON_UFL_HIROSE_RECEPTACLE 2298.5,-1081 r0 bottom
CT7_U0 "Frbclk" CON_UFL_HIROSE_RECEPTACLE 4729.5,-577 r90 bottom (schematic designator CT7)
CT7_U1 "Frbclk" CON_UFL_HIROSE_RECEPTACLE 4109.5,-401 r180 bottom (schematic designator CT7)
CT8 "Fpga_out2" CON_UFL_HIROSE_RECEPTACLE 3513.5,1232 r180 bottom
CT9 "Fpga_out3" CON_UFL_HIROSE_RECEPTACLE 3311.64,1232 r180 bottom
CT10 "Ftcxo_out" CON_UFL_HIROSE_RECEPTACLE 2402.5,-369.86 r270 bottom
D2 "BAV99*" SOT-23 2359.5,529 r90 top
D3 "BAV99" SOT-23 6273.5,480 r90 top
D4 "BAV99" SOT-23 6405.5,1020 r90 top
D5 "LED0" CD1608-0603 5534.5,-596 r0 top
D6 "MBRS340" SMB 5696.5,-778 r0 top
IC3 "AD8052*" SOIC127P600-8AL 1991.5,521 r180 top
IC4 "ADS7886*" SOT23A-6L 1739.5,577 r180 top
IC5 "EP3C5E144C7" EQFP144_N 3010.5,606 r270 top
IC6 "CDCM61004" QFN32_POWERPAD 2743,-92 r270 top
IC7 "AD9516" QFN50P900X900X100-64M 2720.5,-790 r0 top
IC8 "SN74ALVC125" SO-14 6541.5,228 r270 top
IC9 "CFPV-45-25 MHz" vs-705 2024.5,-79 r270 top
IC10 "ADCMP600" SOT23-5AL 6133.5,340 r180 top
IC11 "VM53S3-25.000-2.5/-30+75" VCTCXO_VM53S 2176.5,-666 r0 top
IC12 "AD8541" SOIC127P600-8AL 6081.5,864 r270 top
IC13 "MC100EP16" TSOP65P490-8AN 6101.5,1164 r180 top
IC14 "MC100EPT21" TSOP65P490-8AN 6264.5,-344 r0 top
IC15 "AD5662B" TSOP65P490-8AN 1755.5,-602 r180 top
IC16_U0 "CDCV304" TSOP65P490-8AN 4376.5,-484 r180 top (schematic designator IC16)
IC16_U1 "CDCV304" TSOP65P490-8AN 3802.5,-501 r180 top (schematic designator IC16)
IC17 "AD780AR" R-8C_M 1640.5,-408 r0 top
IC18 "AD5662B" TSOP65P490-8AN 1750.5,-221 r180 top
IC19 "TPS5420" SOIC127P600-8AL 5685.5,-951 r0 top
IC20 "CDCLVD110A" QFP80P900X900-32M 1239.5,145 r180 top
IC21 "TPS78633" SOT223-6L 1856.5,-1054 r180 top
IC22 "FAN1112SX" SOT223-4L 2025.5,963 r180 top
IC23_U0 "TLK1221" QFN40_powerpad 4257.5,-389 r0 top (schematic designator IC23)
IC23_U1 "TLK1221" QFN40_powerpad 3704.5,-389 r0 top locked (schematic designator IC23)
IC24 "ADN4600" LFCSP64_ADN4600 4363.5,701 r135 top
IC26 "MAX3232CDBE4" SSOP16 6169.15,-884.19 r90 top
IC27 "SN65LVDS1" SOT23-5AL 539.5,929 r270 top
IC28 "SN65LVDS2" SOT23-5AL 539.5,755.18 r270 top
IC29 "SN65LVDS1" SOT23-5AL 539.5,581.36 r270 top
IC30 "SN65LVDS2" SOT23-5AL 539.5,407.54 r270 top
IC31 "SN65LVDS1" SOT23-5AL 539.5,233.73 r270 top
IC32 "SN65LVDS2" SOT23-5AL 539.5,59.91 r270 top
IC33 "SN65LVDS1" SOT23-5AL 539.5,-113.91 r270 top
IC34 "SN65LVDS2" SOT23-5AL 539.5,-287.73 r270 top
IC35 "SN65LVDS1" SOT23-5AL 539.5,-461.55 r270 top
IC36 "SN65LVDS2" SOT23-5AL 539.5,-635.36 r270 top
IC37 "SN65LVDS1" SOT23-5AL 539.5,-809.18 r270 top
IC38 "SN65LVDS2" SOT23-5AL 539.5,-983 r270 top
IC39 "TMP100" SOT23A-6L 5672.5,344 r270 top
IC40 "TMP100" SOT23A-6L 4133.5,-139 r180 bottom
IC41 "TMP100" SOT23A-6L 3007.5,607 r0 bottom
IC42 "TMP100" SOT23A-6L 1920.5,-428 r180 bottom
L1 "Ferrite bead" L0603 2616.5,900 r90 bottom
L2 "Ferrite bead" L0603 3371.5,315 r270 bottom
L3 "Ferrite bead" L0603 2715.5,947 r180 bottom
L4 "Ferrite bead" L0603 3420.5,316 r270 bottom
L5 "Ferrite bead" INDC2012-0805 2315.5,-76 r0 top
L6 "Ferrite bead" INDC2012-0805 2242.5,-455 r0 top
L7 "Ferrite bead" INDC1608-0603 2438.5,-85 r180 bottom
L8_SFP0 "Inductor" INDC2012-0805 5485.5,140 r0 top (schematic designator L8)
L8_SFP1 "Inductor" INDC2012-0805 5498.5,852 r0 top (schematic designator L8)
L9_SFP0 "Inductor" INDC2012-0805 5551.5,-108 r0 top (schematic designator L9)
L9_SFP1 "Inductor" INDC2012-0805 5559.5,596 r0 top (schematic designator L9)
L10_U0 "Inductor" INDC1608-0603 4514.5,-141.25 r90 bottom (schematic designator L10)
L10_U1 "Inductor" INDC1608-0603 3968.5,-150.25 r90 bottom (schematic designator L10)
L11 "Ferrite bead" L0603 6580.5,-726.67 r180 top
L12 "Ferrite bead" L0603 6580.5,-628 r180 top
L13 "Ferrite bead" L0603 6580.5,-677.33 r180 top
L14 "Ferrite bead" L0603 6580.5,-776 r180 top
L15 "Ferrite bead" INDC1608-0603 2439.5,-635 r180 bottom
L16 "33uH 7447745330" L_VLCF5020 5370.5,-635 r180 top
R1 "49.9" RESC1608X55N 1553,42 r180 top
R2 "49.9" RESC1608X55N 1554,188 r180 top
R3 "0*" RESC1608X55N 2962,1175 r270 top
R8 "*" RESC1608X55N 2347.5,429 r0 top
R9 "*" RESC1608X55N 2247.5,605 r90 top
R10 "*" RESC1608X55N 2131.5,385 r180 top
R11 "*" RESC1608X55N 2011.5,385 r180 top
R12 "*" RESC1608X55N 2187.5,605 r90 top
R13 "*" RESC1608X55N 2187.5,477 r90 top
R14 "*" RESC1608X55N 2351.5,629 r180 top
R15 "10k" RESC1608X55N 2689.5,319 r90 bottom
R16 "10k" RESC1608X55N 2625.5,319 r90 bottom
R17 "0*" RESC1608X55N 1944.5,-253 r180 top
R18 "100" RESC1608X55N 2871.5,1112 r0 top
R19 "100" RESC1608X55N 2964.5,94 r0 top
R20 "0*" RESC1608X55N 3181.5,313 r270 bottom
R21 "0" RESC1608X55N 3121.5,313 r270 bottom
R22 "22" RESC1608X55N 3130.5,1109 r180 top
R23 "10k" RESC1608X55N 3061.5,313 r270 bottom
R24 "10k" RESC1608X55N 3197.5,901 r270 bottom
R25 "2.2k" RESC1608X55N 6209.5,676 r90 top
R26 "33" RESC1608X55N 6121.5,64 r180 top
R27 "2.2k" RESC1608X55N 6285.5,676 r270 top
R28 "10k" RESC1608X55N 6389.5,636 r180 top
R29 "10k" RESC1608X55N 6153.5,476 r90 top
R30 "470" RESC1608X55N 6684.5,500 r270 top
R31 "470" RESC1608X55N 6453.5,568 r180 top
R32 "49.9" RESC1608X55N 6641.5,148 r180 top
R33 "100" RESC1608X55N 6517.5,776 r0 top
R34 "100" RESC1608X55N 6517.5,708 r0 top
R35 "22" RESC1608X55N 5967.5,447 r90 top
R36 "22" RESC1608X55N 3042.5,-891 r0 top
R37 "10k" RESC1608X55N 6141.5,1040 r0 top
R38 "10k" RESC1608X55N 6363,939 r180 top
R39 "100k" RESC1608X55N 6161.5,1276 r180 top
R40 "470" RESC1608X55N 6425.5,1124 r180 top
R41 "100" RESC1608X55N 6553.5,1192 r0 top
R42 "100" RESC1608X55N 6553.5,1124 r0 top
R43 "22" RESC1608X55N 3043.5,-827 r0 top
R44 "100" RESC1608X55N 2806.5,-204 r90 top
R45 "470" RESC1608X55N 1946.5,-636 r0 top
R46 "49.9" RESC1608X55N 6665.5,-124 r180 top
R47 "100" RESC1608X55N 6078.5,-343 r270 top
R48 "0*" RESC1608X55N 2279.5,-366 r90 top
R49 "100" RESC1608X55N 2469.5,-979 r90 top
R50 "5.1k" RESC1608X55N 2608.5,-516 r270 top
R51 "0*" RESC1608X55N 1947.5,-697 r180 top
R52 "470" RESC1608X55N 1944.5,-190 r0 top
R53_U0 "49.9" RESC1608X55N 4395.5,-28 r270 bottom (schematic designator R53)
R53_U1 "49.9" RESC1608X55N 3855.5,-19 r270 bottom (schematic designator R53)
R54_U0 "49.9" RESC1608X55N 4458.5,-28 r270 bottom (schematic designator R54)
R54_U1 "49.9" RESC1608X55N 3918.5,-19 r270 bottom (schematic designator R54)
R55 "100" RESC1608X55N 3589.5,646 r90 top
R56 "270" RESC1608X55N 5670.5,-595 r180 top
R57 "22" RESC1608X55N 4204.5,-560 r90 top
R58 "22" RESC1608X55N 3616.5,-547 r0 top
R59 "0*" RESC1608X55N 2434.5,-481 r0 top
R60 "200" RESC1608X55N 5915.5,1145 r180 top
R61 "200" RESC1608X55N 5915.5,1206 r0 top
R62 "10k" RESC1608X55N 5345.5,-1071 r180 bottom
R63 "4.12k" RESC1608X55N 2723.5,-516 r270 top
R64 "3.24k" RESC1608X55N 5631.5,-1087 r180 top
R65 "22" RESC1608X55N 2559.5,-508 r90 bottom
R66 "820" RESC1608X55N 2227.5,-851 r270 top
R67 "390" RESC1608X55N 2440.5,-762 r180 top
R69 "0" RESC1005X40N 4483.48,243 r0 bottom
R70_SFP0 "0*" RESC1608X55N 5484.5,-264 r0 top (schematic designator R70)
R70_SFP1 "0*" RESC1608X55N 5740.5,585 r90 top (schematic designator R70)
R71_SFP0 "0*" RESC1608X55N 5484.5,-203 r0 top (schematic designator R71)
R71_SFP1 "0*" RESC1608X55N 5800.5,585 r90 top (schematic designator R71)
R72 "0" RESC1005X40N 5090.5,141 r0 bottom
R73 "100" RESC1608X55N 431.5,762 r90 top
R74 "100" RESC1608X55N 432.5,408 r90 top
R75 "100" RESC1608X55N 432.5,61 r90 top
R76 "100" RESC1608X55N 432.5,-286 r90 top
R77 "100" RESC1608X55N 432.5,-633 r90 top
R78 "100" RESC1608X55N 432.5,-980 r90 top
R79 "0" RESC1005X40N 4483.48,285 r0 bottom
R80 "0" RESC1005X40N 5089.52,184 r0 bottom
R81 "0" RESC1005X40N 4440.5,126 r0 bottom
R82 "0" RESC1005X40N 5089.52,-5 r0 bottom
R83 "200" RESC1608X55N 2840.5,-1063 r270 top
R84 "200" RESC1608X55N 2692.5,-1064 r90 top
R85 "0" RESC1005X40N 4440.5,88 r0 bottom
R86 "0" RESC1005X40N 5089.52,-46 r0 bottom
R87 "0" RESC1005X40N 4243.57,320.15 r0 bottom
R88 "0" RESC1005X40N 5050.52,839 r0 bottom
R89 "0" RESC1005X40N 4243.57,364.13 r0 bottom
R90 "0" RESC1005X40N 5050.52,881 r0 bottom
R91 "0" RESC1005X40N 3857.27,144.07 r90 bottom
R92 "0" RESC1005X40N 4792.52,639 r0 bottom
R93 "0" RESC1005X40N 3898.46,144.07 r90 bottom
R94 "0" RESC1005X40N 4792.52,599 r0 bottom
R95 "0" RESC1608X55N 2355.5,-909 r270 bottom
R96 "0" RESC1005X40N 3640.5,-430 r0 top
R97 "0*" RESC1005X40N 3623.5,-375 r270 top
RP1_U0 "22 0804" YC124 4602.5,-248 r180 top (schematic designator RP1)
RP1_U1 "22 0804" YC124 4021.5,-216 r180 top locked (schematic designator RP1)
RP2_U0 "22 0804" YC124 4603.5,-340 r180 top (schematic designator RP2)
RP2_U1 "22 0804" YC124 4021.5,-315 r180 top locked (schematic designator RP2)
RP3_U0 "22 0804" YC124 4560.5,-452 r90 top (schematic designator RP3)
RP3_U1 "22 0804" YC124 3982.5,-482 r90 top (schematic designator RP3)
RP4_SFP0 "10k 0804" YC124 5683.5,32 r0 top (schematic designator RP4)
RP4_SFP1 "10k 0804" YC124 5711.5,753 r0 top (schematic designator RP4)
RP5_SFP0 "10k 0804" YC124 5683.5,132 r0 top (schematic designator RP5)
RP5_SFP1 "10k 0804" YC124 5711.5,853 r0 top (schematic designator RP5)
RP6 "22 0804" YC124 934.5,585 r90 top
RP7 "22 0804" YC124 819.5,583 r90 top
SJ1 "Solder joint (open)" SJOINT_norm_open 2801.5,-299 r180 top
SJ2 "Solder joint (open)" SJOINT_norm_open 2801.5,-364 r180 top
SJ3 "Solder joint (open)" SJOINT_norm_open 2461.5,-233 r0 top
SJ4 "Solder joint (open)" SJOINT_norm_open 2406.5,-234 r0 top
SJ5 "Solder joint (closed)" SJOINT_norm_short 2409.5,-303 r0 top
SJ6 "Solder joint (closed)" SJOINT_norm_short 2474.5,-143 r0 top
SJ7 "Solder joint (open)" SJOINT_norm_open 2407.5,-146 r0 top

## Footprints (in the part's own frame and the unit in brackets; to place one, negate y for a bottom-side part, rotate by r counter-clockwise, add the part's x,y. Pads: shape width x height; smd on the part's side, far side on the other; paste and mask are expansions set on the pad)
CAPC1005X55N#1 [mm] "Chip Capacitor, Body 1.0x0.55mm, IPC Medium Density"
  rect 0.62x0.62 smd: 1(-0.45,0) 2(0.45,0)
  body extent -0.52,-0.27 0.53,0.28, height 0.55
CAPC1005X55N#2 [mm] "Chip Capacitor, Body 1.0x0.55mm, IPC Medium Density"
  rect 0.6x0.65 smd: 1(-0.6,0) 2(0.6,0)
  body extent -0.53,-0.28 0.53,0.28, height 0.55
CAPC1608X87N [mm] "Chip Capacitor, Body 1.6x0.8mm IPC Medium Density"
  rect 0.95x1 smd: 1(-0.8,0) 2(0.8,0)
  silkscreen extent 0,-0.5 0,0.5, body extent -0.87,-0.47 0.88,0.48, height 0.87
CAPC2012X135N [mm] "Chip Capacitor, Body 2.0x1.25mm, IPC Medium Density"
  rect 1.05x1.4 smd: 1(-0.9,0) 2(0.9,0)
  silkscreen extent 0,-0.7 0,0.7, body extent -1.05,-0.67 1.05,0.67, height 1.35
CAPC3216X140N [mm] "Chip Capacitor, Body 3.2x1.6mm, IPC Medium Density"
  rect 1.15x1.8 smd: 1(-1.5,0) 2(1.5,0)
  silkscreen extent -0.5,-0.9 0.5,0.9, body extent -1.7,-0.9 1.7,0.9, height 1.4
CAPMP3216X180N [mm] "Capacitor, Polarized, Molded  Body 3.2x1.6mm, IPC Medium Density"
  rect 1.8x1.25 smd: 1(-1.3,0) 2(1.3,0)
  silkscreen extent -2.38,-0.9 1.7,1.17, body extent -1.73,-0.9 1.72,0.9, height 1.81
CAPMP3528X210N [mm] "Capacitor, Polarized, Molded  Body 3.5x2.8mm, IPC Medium Density"
  rect 1.8x2.25 smd: 1(-1.45,0) 2(1.45,0)
  silkscreen extent -2.52,-1.5 1.85,1.67, body extent -1.85,-1.5 1.85,1.5, height 2.1
CAPMP7343X430N [mm] "Capacitor, Polarized, Molded  Body 7.3x4.3mm, IPC Medium Density"
  rect 2.35x2.45 smd: 1(-3.1,0) 2(3.1,0)
  silkscreen extent -4.42,-2.3 3.8,2.3, body extent -3.8,-2.3 3.8,2.3, height 4.3
CC1608-0603 [mm]
  rect 1.1x1 smd: 1(-0.85,0) 2(0.85,0)
  silkscreen extent -1.8,-0.9 1.3,0.9
CD1608-0603 [mm] "Chip Diode; Body 1.6 x 0.8 mm (LxW typ)"
  rect 1.1x1 smd: 1(-0.85,0) 2(0.85,0)
  silkscreen extent 1.7,-0.4 1.7,0.4
CON_UFL_HIROSE_RECEPTACLE [mm]
  rect 1x1.1 smd: 1(1.45,-1.6)
  rect 1.1x2.2 smd: 2(0,0) 2(2.9,0)
  silkscreen extent -0.8,-2.5 3.75,2.3
DF17-30-PLUG [mm]
  rect 1.25x2.1 smd far side: 0(-5.65,0) 0(5.65,0)
  round 1 hole 0.6: 0(-4.75,-1.9) 0(4.75,-1.9)
  rect 0.25x1.2 smd far side: 1(-3.5,-2.6) 2(-3.5,2.6) 3(-3,-2.6) 4(-3,2.6) 5(-2.5,-2.6) 6(-2.5,2.6) 7(-2,-2.6) 8(-2,2.6) 9(-1.5,-2.6) 10(-1.5,2.6) 11(-1,-2.6) 12(-1,2.6) 13(-0.5,-2.6) 14(-0.5,2.6) 15(0,-2.6) 16(0,2.6) 17(0.5,-2.6) 18(0.5,2.6) 19(1,-2.6) 20(1,2.6) 21(1.5,-2.6) 22(1.5,2.6) 23(2,-2.6) 24(2,2.6) 25(2.5,-2.6) 26(2.5,2.6) 27(3,-2.6) 28(3,2.6) 29(3.5,-2.6) 30(3.5,2.6)
DF17-30-SOCKET [mm]
  rect 1.25x2.1 smd: 0(-5.65,0) 0(5.65,0)
  rect 0.25x1.2 smd: 1(-3.5,-2.6) 2(-3.5,2.6) 3(-3,-2.6) 4(-3,2.6) 5(-2.5,-2.6) 6(-2.5,2.6) 7(-2,-2.6) 8(-2,2.6) 9(-1.5,-2.6) 10(-1.5,2.6) 11(-1,-2.6) 12(-1,2.6) 13(-0.5,-2.6) 14(-0.5,2.6) 15(0,-2.6) 16(0,2.6) 17(0.5,-2.6) 18(0.5,2.6) 19(1,-2.6) 20(1,2.6) 21(1.5,-2.6) 22(1.5,2.6) 23(2,-2.6) 24(2,2.6) 25(2.5,-2.6) 26(2.5,2.6) 27(3,-2.6) 28(3,2.6) 29(3.5,-2.6) 30(3.5,2.6)
  silkscreen extent -4.8,-1.8 4.8,1.8
DSUB_MINI_9 [mm]
  oval 0.9x1.5 hole 0.6: 1(-2.54,-2.54) 2(-1.27,-2.54) 3(0,-2.54) 4(1.27,-2.54) 5(2.54,-2.54) 6(-1.905,0) 7(-0.635,0) 8(0.635,0) 9(1.905,0)
  round 3.8 hole 2.79: 10(-7.62,1.27) 11(7.62,1.27)
  silkscreen extent -9.78,-3.43 9.78,9.78
EQFP144_N [mm] "Thin QFP, 144-Leads, Body 20x20mm, Pitch 0.5mm, IPC Medium Density"
  oval 1.8x0.3 smd: 1(-10.55,8.75) 2(-10.55,8.25) 3(-10.55,7.75) 4(-10.55,7.25) 5(-10.55,6.75) 6(-10.55,6.25) 7(-10.55,5.75) 8(-10.55,5.25) 9(-10.55,4.75) 10(-10.55,4.25) 11(-10.55,3.75) 12(-10.55,3.25) 13(-10.55,2.75) 14(-10.55,2.25) 15(-10.55,1.75) 16(-10.55,1.25) 17(-10.55,0.75) 18(-10.55,0.25) 19(-10.55,-0.25) 20(-10.55,-0.75) 21(-10.55,-1.25) 22(-10.55,-1.75) 23(-10.55,-2.25) 24(-10.55,-2.75) 25(-10.55,-3.25) 26(-10.55,-3.75) 27(-10.55,-4.25) 28(-10.55,-4.75) 29(-10.55,-5.25) 30(-10.55,-5.75) 31(-10.55,-6.25) 32(-10.55,-6.75) 33(-10.55,-7.25) 34(-10.55,-7.75) 35(-10.55,-8.25) 36(-10.55,-8.75) 73(10.55,-8.75) 74(10.55,-8.25) 75(10.55,-7.75) 76(10.55,-7.25) 77(10.55,-6.75) 78(10.55,-6.25) 79(10.55,-5.75) 80(10.55,-5.25) 81(10.55,-4.75) 82(10.55,-4.25) 83(10.55,-3.75) 84(10.55,-3.25) 85(10.55,-2.75) 86(10.55,-2.25) 87(10.55,-1.75) 88(10.55,-1.25) 89(10.55,-0.75) 90(10.55,-0.25) 91(10.55,0.25) 92(10.55,0.75) 93(10.55,1.25) 94(10.55,1.75) 95(10.55,2.25) 96(10.55,2.75) 97(10.55,3.25) 98(10.55,3.75) 99(10.55,4.25) 100(10.55,4.75) 101(10.55,5.25) 102(10.55,5.75) 103(10.55,6.25) 104(10.55,6.75) 105(10.55,7.25) 106(10.55,7.75) 107(10.55,8.25) 108(10.55,8.75)
  oval 0.3x1.8 smd: 37(-8.75,-10.55) 38(-8.25,-10.55) 39(-7.75,-10.55) 40(-7.25,-10.55) 41(-6.75,-10.55) 42(-6.25,-10.55) 43(-5.75,-10.55) 44(-5.25,-10.55) 45(-4.75,-10.55) 46(-4.25,-10.55) 47(-3.75,-10.55) 48(-3.25,-10.55) 49(-2.75,-10.55) 50(-2.25,-10.55) 51(-1.75,-10.55) 52(-1.25,-10.55) 53(-0.75,-10.55) 54(-0.25,-10.55) 55(0.25,-10.55) 56(0.75,-10.55) 57(1.25,-10.55) 58(1.75,-10.55) 59(2.25,-10.55) 60(2.75,-10.55) 61(3.25,-10.55) 62(3.75,-10.55) 63(4.25,-10.55) 64(4.75,-10.55) 65(5.25,-10.55) 66(5.75,-10.55) 67(6.25,-10.55) 68(6.75,-10.55) 69(7.25,-10.55) 70(7.75,-10.55) 71(8.25,-10.55) 72(8.75,-10.55) 109(8.75,10.55) 110(8.25,10.55) 111(7.75,10.55) 112(7.25,10.55) 113(6.75,10.55) 114(6.25,10.55) 115(5.75,10.55) 116(5.25,10.55) 117(4.75,10.55) 118(4.25,10.55) 119(3.75,10.55) 120(3.25,10.55) 121(2.75,10.55) 122(2.25,10.55) 123(1.75,10.55) 124(1.25,10.55) 125(0.75,10.55) 126(0.25,10.55) 127(-0.25,10.55) 128(-0.75,10.55) 129(-1.25,10.55) 130(-1.75,10.55) 131(-2.25,10.55) 132(-2.75,10.55) 133(-3.25,10.55) 134(-3.75,10.55) 135(-4.25,10.55) 136(-4.75,10.55) 137(-5.25,10.55) 138(-5.75,10.55) 139(-6.25,10.55) 140(-6.75,10.55) 141(-7.25,10.55) 142(-7.75,10.55) 143(-8.25,10.55) 144(-8.75,10.55)
  rect 4.3x4.3 smd: 145(0,0)
  silkscreen extent -10.67,-9.25 9.25,9.58, body extent -10,-10 10,10, height 1.6
INDC1608-0603 [mm] "Chip Inductor; Body 1.6 x 0.8 mm (LxW typ)"
  rect 0.9x0.8 smd: 1(-0.7,0) 2(0.7,0)
  silkscreen extent -1.45,-0.3 -1.45,0.3
INDC2012-0805 [mm] "Chip Inductor; Body 2 x 1.2 mm (LxW typ)"
  rect 1x1.2 smd: 1(-1,0) 2(1,0)
  silkscreen extent -0.2,-0.5 0.2,0.5
JAE_KX14_50P [mm]
  rect 0.5x2.4 smd: 1(-9.6,-2.6) 2(-9.6,2.6) 3(-8.8,-2.6) 4(-8.8,2.6) 5(-8,-2.6) 6(-8,2.6) 7(-7.2,-2.6) 8(-7.2,2.6) 9(-6.4,-2.6) 10(-6.4,2.6) 11(-5.6,-2.6) 12(-5.6,2.6) 13(-4.8,-2.6) 14(-4.8,2.6) 15(-4,-2.6) 16(-4,2.6) 17(-3.2,-2.6) 18(-3.2,2.6) 19(-2.4,-2.6) 20(-2.4,2.6) 21(-1.6,-2.6) 22(-1.6,2.6) 23(-0.8,-2.6) 24(-0.8,2.6) 25(0,-2.6) 26(0,2.6) 27(0.8,-2.6) 28(0.8,2.6) 29(1.6,-2.6) 30(1.6,2.6) 31(2.4,-2.6) 32(2.4,2.6) 33(3.2,-2.6) 34(3.2,2.6) 35(4,-2.6) 36(4,2.6) 37(4.8,-2.6) 38(4.8,2.6) 39(5.6,-2.6) 40(5.6,2.6) 41(6.4,-2.6) 42(6.4,2.6) 43(7.2,-2.6) 44(7.2,2.6) 45(8,-2.6) 46(8,2.6) 47(8.8,-2.6) 48(8.8,2.6) 49(9.6,-2.6) 50(9.6,2.6)
  rect 2.5x2.7 smd: ""(-14.1,0) ""(14.1,0.05)
  round 1.3 hole 0.9: ""(-10.35,0) ""(10.35,0)
  silkscreen extent -14,-3.75 14,3.75
L0603 [mm] "Chip Inductor; Body 1.6 x 0.8 mm (LxW typ)"
  rect 0.9x0.8 smd: 1(-0.7,0) 2(0.7,0)
  silkscreen extent -1.45,-0.3 -1.45,0.3
L_VLCF5020 [mm]
  rect 4.9x2.1 smd: 1(0,1.05) 2(0,4.45)
  silkscreen extent -2.65,-0.2 2.65,5.7
LFCSP64_ADN4600 [mm] "LFCSP64_ADN4600"
  oval 0.8x0.3 smd: 1(-4.55,3.75) 2(-4.55,3.25) 3(-4.55,2.75) 4(-4.55,2.25) 5(-4.55,1.75) 6(-4.55,1.25) 7(-4.55,0.75) 8(-4.55,0.25) 9(-4.55,-0.25) 10(-4.55,-0.75) 11(-4.55,-1.25) 12(-4.55,-1.75) 13(-4.55,-2.25) 14(-4.55,-2.75) 15(-4.55,-3.25) 16(-4.55,-3.75) 33(4.55,-3.75) 34(4.55,-3.25) 35(4.55,-2.75) 36(4.55,-2.25) 37(4.55,-1.75) 38(4.55,-1.25) 39(4.55,-0.75) 40(4.55,-0.25) 41(4.55,0.25) 42(4.55,0.75) 43(4.55,1.25) 44(4.55,1.75) 45(4.55,2.25) 46(4.55,2.75) 47(4.55,3.25) 48(4.55,3.75)
  oval 0.3x0.8 smd: 17(-3.75,-4.55) 18(-3.25,-4.55) 19(-2.75,-4.55) 20(-2.25,-4.55) 21(-1.75,-4.55) 22(-1.25,-4.55) 23(-0.75,-4.55) 24(-0.25,-4.55) 25(0.25,-4.55) 26(0.75,-4.55) 27(1.25,-4.55) 28(1.75,-4.55) 29(2.25,-4.55) 30(2.75,-4.55) 31(3.25,-4.55) 32(3.75,-4.55) 49(3.75,4.55) 50(3.25,4.55) 51(2.75,4.55) 52(2.25,4.55) 53(1.75,4.55) 54(1.25,4.55) 55(0.75,4.55) 56(0.25,4.55) 57(-0.25,4.55) 58(-0.75,4.55) 59(-1.25,4.55) 60(-1.75,4.55) 61(-2.25,4.55) 62(-2.75,4.55) 63(-3.25,4.55) 64(-3.75,4.55)
  rect 6.2x6.2 smd paste-200: 65(0,0)
  silkscreen extent -5.62,-4.55 4.55,4.55, body extent -4.5,-4.5 4.5,4.5, height 0.8
MCH_SPECIAL_FP_CLOCKS [mm]
  round 1.5 hole 0.7 paste-1000: 1(-6.6,-1.2)
  rect 5.4x2 smd paste-1000: 2(-4.7,-3.4) 2(-4.7,1)
  silkscreen extent -6.8,-4.4 5.2,2
QFN32_POWERPAD [mm]
  oval 0.8x0.25 smd: 1(0.4,-1.2)
  rect 0.8x0.25 smd: 2(0.4,-1.7) 3(0.4,-2.2) 4(0.4,-2.7) 5(0.4,-3.2) 6(0.4,-3.7) 7(0.4,-4.2) 8(0.4,-4.7) 17(5.4,-4.7) 18(5.4,-4.2) 19(5.4,-3.7) 20(5.4,-3.2) 21(5.4,-2.7) 22(5.4,-2.2) 23(5.4,-1.7) 24(5.4,-1.2)
  rect 0.25x0.8 smd: 9(1.15,-5.45) 10(1.65,-5.45) 11(2.15,-5.45) 12(2.65,-5.45) 13(3.15,-5.45) 14(3.65,-5.45) 15(4.15,-5.45) 16(4.65,-5.45) 25(4.65,-0.45) 26(4.15,-0.45) 27(3.65,-0.45) 28(3.15,-0.45) 29(2.65,-0.45) 30(2.15,-0.45) 31(1.65,-0.45) 32(1.15,-0.45)
  rect 3x3 smd paste-10: PAD(2.94,-2.978)
  silkscreen extent 0,-5.85 5.8,-0.05
QFN40_powerpad [mm]
  rrect50% 0.85x0.23 smd: 1(0.425,5.65) 2(0.425,5.15) 3(0.425,4.65) 4(0.425,4.15) 5(0.425,3.65) 6(0.425,3.15) 7(0.425,2.65) 8(0.425,2.15) 9(0.425,1.65) 10(0.425,1.15) 21(6.375,1.15) 22(6.375,1.65) 23(6.375,2.15) 24(6.375,2.65) 25(6.375,3.15) 26(6.375,3.65) 27(6.375,4.15) 28(6.375,4.65) 29(6.375,5.15) 30(6.375,5.65)
  rrect50% 0.23x0.85 smd: 11(1.15,0.425) 12(1.65,0.425) 13(2.15,0.425) 14(2.65,0.425) 15(3.15,0.425) 16(3.65,0.425) 17(4.15,0.425) 18(4.65,0.425) 19(5.15,0.425) 20(5.65,0.425) 31(5.65,6.375) 32(5.15,6.375) 33(4.65,6.375) 34(4.15,6.375) 35(3.65,6.375) 36(3.15,6.375) 37(2.65,6.375) 38(2.15,6.375) 39(1.65,6.375) 40(1.15,6.375)
  rect 3x3 smd paste-2.54: PAD(3.4,3.4)
  silkscreen extent -0.82,0 6.8,6.8
QFN50P900X900X100-64M [mm] "QFN, 64-Leads, Body 9.1x9.1mm (max), Pitch 0.50mm, IPC Low Density"
  oval 0.75x0.25 smd: 1(-4.575,3.75) 2(-4.575,3.25) 3(-4.575,2.75) 4(-4.575,2.25) 5(-4.575,1.75) 6(-4.575,1.25) 7(-4.575,0.75) 8(-4.575,0.25) 9(-4.575,-0.25) 10(-4.575,-0.75) 11(-4.575,-1.25) 12(-4.575,-1.75) 13(-4.575,-2.25) 14(-4.575,-2.75) 15(-4.575,-3.25) 16(-4.575,-3.75) 33(4.575,-3.75) 34(4.575,-3.25) 35(4.575,-2.75) 36(4.575,-2.25) 37(4.575,-1.75) 38(4.575,-1.25) 39(4.575,-0.75) 40(4.575,-0.25) 41(4.575,0.25) 42(4.575,0.75) 43(4.575,1.25) 44(4.575,1.75) 45(4.575,2.25) 46(4.575,2.75) 47(4.575,3.25) 48(4.575,3.75)
  oval 0.25x0.75 smd: 17(-3.75,-4.575) 18(-3.25,-4.575) 19(-2.75,-4.575) 20(-2.25,-4.575) 21(-1.75,-4.575) 22(-1.25,-4.575) 23(-0.75,-4.575) 24(-0.25,-4.575) 25(0.25,-4.575) 26(0.75,-4.575) 27(1.25,-4.575) 28(1.75,-4.575) 29(2.25,-4.575) 30(2.75,-4.575) 31(3.25,-4.575) 32(3.75,-4.575) 49(3.75,4.575) 50(3.25,4.575) 51(2.75,4.575) 52(2.25,4.575) 53(1.75,4.575) 54(1.25,4.575) 55(0.75,4.575) 56(0.25,4.575) 57(-0.25,4.575) 58(-0.75,4.575) 59(-1.25,4.575) 60(-1.75,4.575) 61(-2.25,4.575) 62(-2.75,4.575) 63(-3.25,4.575) 64(-3.75,4.575)
  rect 5.6x5.6 smd paste-100: PAD(0,0)
  silkscreen extent -5.62,-4.6 4.6,4.6, body extent -4.55,-4.55 4.55,4.55, height 1
QFP80P900X900-32M [mm] "32-Pin Quad Flat Pack 0.8 mm Pitch"
  oval 1.95x0.6 smd: 1(-4.25,2.8) 2(-4.25,2) 3(-4.25,1.2) 4(-4.25,0.4) 5(-4.25,-0.4) 6(-4.25,-1.2) 7(-4.25,-2) 8(-4.25,-2.8) 17(4.25,-2.8) 18(4.25,-2) 19(4.25,-1.2) 20(4.25,-0.4) 21(4.25,0.4) 22(4.25,1.2) 23(4.25,2) 24(4.25,2.8)
  oval 0.6x1.95 smd: 9(-2.8,-4.25) 10(-2,-4.25) 11(-1.2,-4.25) 12(-0.4,-4.25) 13(0.4,-4.25) 14(1.2,-4.25) 15(2,-4.25) 16(2.8,-4.25) 25(2.8,4.25) 26(2,4.25) 27(1.2,4.25) 28(0.4,4.25) 29(-0.4,4.25) 30(-1.2,4.25) 31(-2,4.25) 32(-2.8,4.25)
  silkscreen extent -4.38,-2.85 2.85,3.77, body extent -3.5,-3.5 3.5,3.5, height 1.7
R-8C_M [mm] "SOIC, 8-Leads, Body 4.9x3.9mm, Pitch 1.27mm, IPC Low Density"
  oval 2.5x0.7 smd: 1(-2.45,1.905) 2(-2.45,0.635) 3(-2.45,-0.635) 4(-2.45,-1.905) 5(2.45,-1.905) 6(2.45,-0.635) 7(2.45,0.635) 8(2.45,1.905)
  silkscreen extent -2.57,-2.5 0.8,2.93, body extent -2,-2.5 2,2.5, height 1.75
RESC1005X40N [mm] "Chip Resistor, Body 1.0x0.5mm, IPC Medium Density"
  rect 0.6x0.6 smd: 1(-0.45,0) 2(0.45,0)
  body extent -0.53,-0.28 0.53,0.28, height 0.4
RESC1608X55N [mm] "Chip Resistor, EIA 0603, Metric 1608, Body 1.6x0.8mm, IPC Medium Density"
  rect 0.9x1 smd: 1(-0.8,0) 2(0.8,0)
  silkscreen extent 0,-0.5 0,0.5, body extent -0.87,-0.47 0.88,0.48, height 0.55
SFP_SINGLE_PORT [mm]
  rect 0.5x2 smd: 1(3.73,-3.2) 2(4.53,-3.2) 3(5.33,-3.2) 4(6.13,-3.2) 5(6.93,-3.2) 6(7.73,-3.2) 7(8.53,-3.2) 8(9.33,-3.2) 9(10.13,-3.2) 10(10.93,-3.2) 11(10.53,5) 12(9.73,5) 13(8.93,5) 14(8.13,5) 15(7.33,5) 16(6.53,5) 17(5.73,5) 18(4.93,5) 19(4.13,5) 20(3.33,5)
  rect 2x2 hole 1.3: 21(0,0) 22(14.25,5) 23(14.25,-5) 24(0,-10) 25(5.68,-10) 26(11.08,-10) 27(14.25,-15) 28(0,-20) 29(14.25,-25) 30(0,-30) 31(8.58,-30)
  round 0.9 hole 0.9 unplated: ""(0,-7.2) ""(0,-2.5) ""(0,2.5) ""(2.33,7.1) ""(7.13,7.1) ""(11.93,7.1) ""(14.25,-7.2) ""(14.25,-2.5) ""(14.25,2.5)
  round 1.6 hole 1.6 unplated: ""(2.33,0.9) ""(11.93,0.9)
  Top Layer pour cut-out: 1.016,6.858 3.556,6.858 3.556,7.874 5.461,7.874 5.461,6.858 8.382,6.858 8.382,7.874 10.287,7.874 10.287,6.858 13.208,6.858 13.208,-7.747 1.016,-7.747 1.016,6.858
  Top Layer keep-out region: 1.524,4.572 2.794,4.572 2.794,1.905 1.524,1.905
  Top Layer keep-out region: 1.524,-0.127 3.048,-0.127 3.048,-3.302 1.524,-3.302
  Top Layer keep-out region: 11.43,-0.127 12.7,-0.127 12.7,-3.302 11.43,-3.302
  Top Layer keep-out region: 11.176,4.572 12.7,4.572 12.7,1.905 11.176,1.905
  silkscreen extent -1.14,-34.42 15.37,7.87
SJOINT_norm_open [mm]
  rrect100% 0.4x1.2 smd paste-1000: 1(-0.35,0) 2(0.35,0)
  rect 0.3x1.2 smd paste-1000: 1(-0.25,0) 2(0.25,0)
  silkscreen extent -0.65,-0.7 0.65,0.7
SJOINT_norm_short [mm]
  rrect100% 0.4x1.2 smd paste-1000: 1(-0.35,0) 2(0.35,0)
  rect 0.3x1.2 smd paste-1000: 1(-0.25,0) 2(0.25,0)
  Top Layer region: -0.154,-0.2 0.146,-0.2 0.146,0.2 -0.154,0.2
  silkscreen extent -0.65,-0.7 0.65,0.7
SMB [mm] "DO-214-AA/SMB; 2 C-Bend Leads; Body 5.3 x 3.6 mm, inc. leads (LxW)"
  rect 2.3x2.3 smd: 1(-2.25,0) 2(2.25,0)
  silkscreen extent -3.8,-1.55 4.1,1.55
SO-14 [mil]
  oval 80x24 smd: 1(0,0) 2(0,-50) 3(0,-100) 4(0,-150) 5(0,-200) 6(0,-250) 7(0,-300) 8(220,-300) 9(220,-250) 10(220,-200) 11(220,-150) 12(220,-100) 13(220,-50) 14(220,0)
  silkscreen extent 60,-325 160,25
SOIC127P600-8AL [mm] "SOIC, 8-Leads, Body 4.9x3.9mm, Pitch 1.27mm, IPC High Density"
  oval 1.7x0.6 smd: 1(-2.45,1.905) 2(-2.45,0.635) 3(-2.45,-0.635) 4(-2.45,-1.905) 5(2.45,-1.905) 6(2.45,-0.635) 7(2.45,0.635) 8(2.45,1.905)
  silkscreen extent -2.58,-2.5 1.2,2.88, body extent -2,-2.5 2,2.5, height 2.72
SOT23-5AL [mm] "SOT23, 5-Leads, Body 2.9x1.6mm, Pitch 0.95mm, Lead Span 2.8mm, IPC High Density"
  rect 0.9x0.65 smd: 1(-1.2,0.95) 2(-1.2,0) 3(-1.2,-0.95) 4(1.2,-0.95) 5(1.2,0.95)
  silkscreen extent -1.33,-1.55 0.35,1.95, body extent -0.9,-1.55 0.9,1.55, height 1.45
SOT23A-6L [mm] "SOT23, 6-Leads, Body 2.9x1.7mm, Pitch 0.95mm, Lead Span 2.8mm, IPC High Density"
  rect 0.9x0.65 smd: 1(-1.2,0.95) 2(-1.2,0) 3(-1.2,-0.95) 4(1.2,-0.95) 5(1.2,0) 6(1.2,0.95)
  silkscreen extent -1.33,-1.55 0.35,1.95, body extent -0.9,-1.55 0.9,1.55, height 1.45
SOT223-4L [mm] "SOT223, 4-Leads, Body 6.5x3.5mm, Pitch 2.3mm, Lead Span 7mm, IPC High Density"
  rect 2.1x0.9 smd: 1(-2.85,2.3) 2(-2.85,0) 3(-2.85,-2.3)
  rect 2.1x3.2 smd: 4(2.85,0)
  silkscreen extent -2.98,-3.35 1.5,3.42, body extent -1.85,-3.35 1.85,3.35, height 1.8
SOT223-6L [mm] "SOT223, 6-Leads, Body 6.5x3.5mm, Pitch 2.3mm, Lead Span 7mm, IPC High Density"
  rect 2.1x0.8 smd: 1(-3.175,2.54) 2(-3.175,1.27) 3(-3.175,0) 4(-3.175,-1.27) 5(-3.175,-2.54)
  rect 2.1x3.2 smd: 6(2.85,0)
  silkscreen extent -2.98,-3.35 1.5,3.42, body extent -1.85,-3.35 1.85,3.35, height 1.8